# Allegro board IA6140.brd
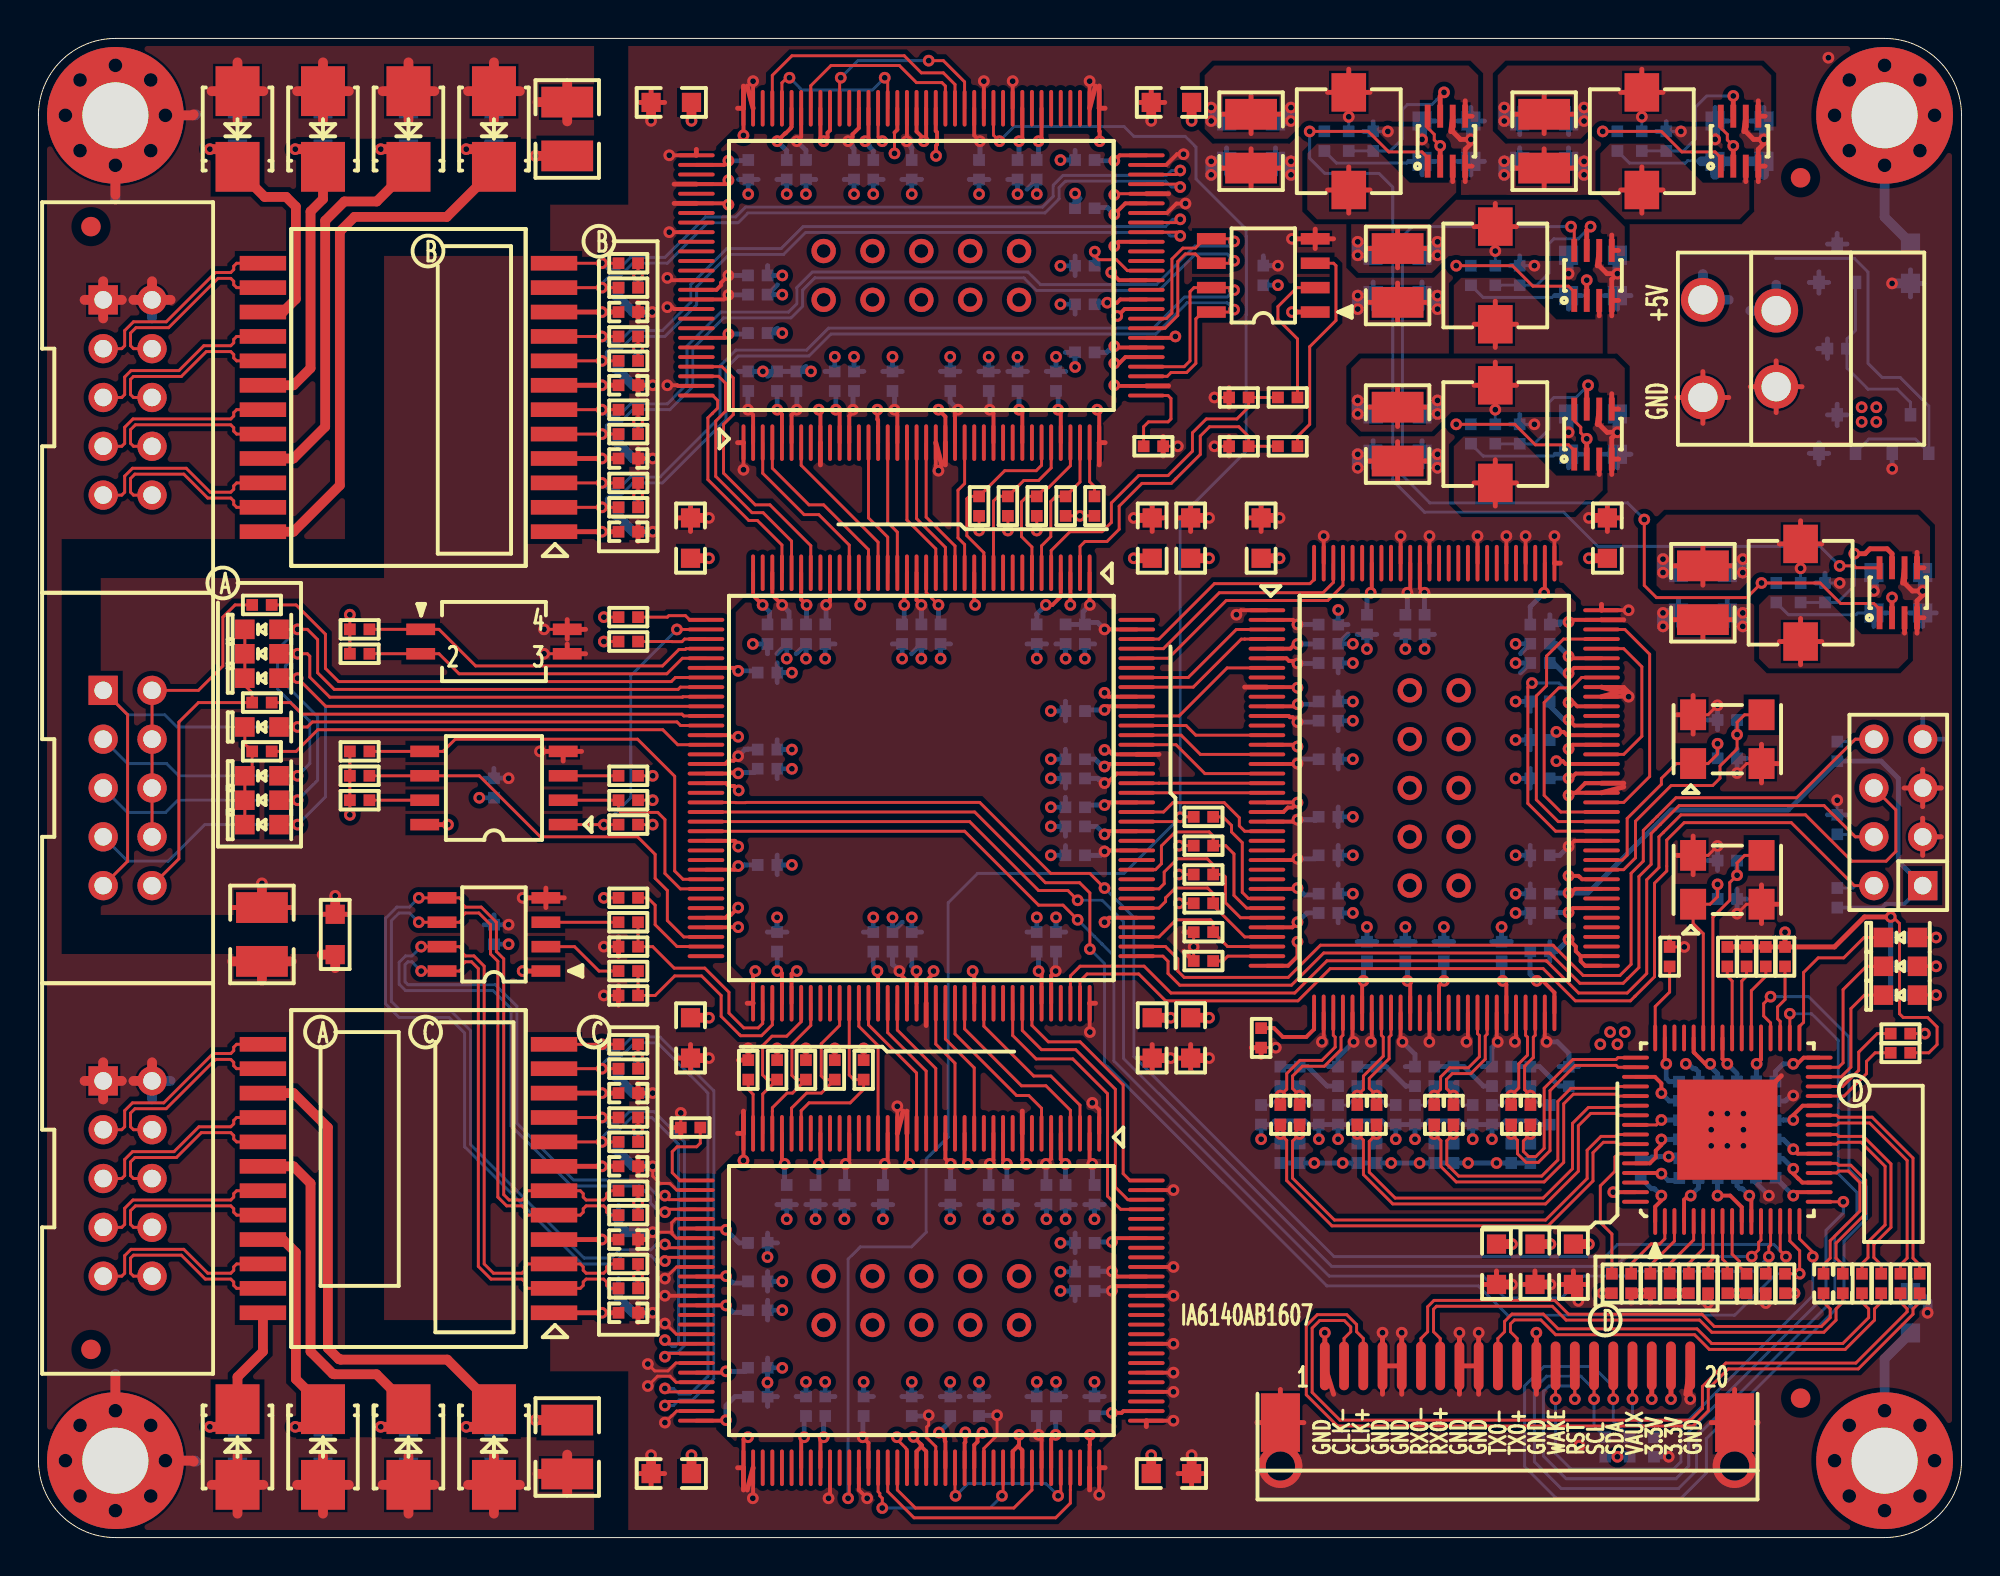
[diagram p0: board, top side]
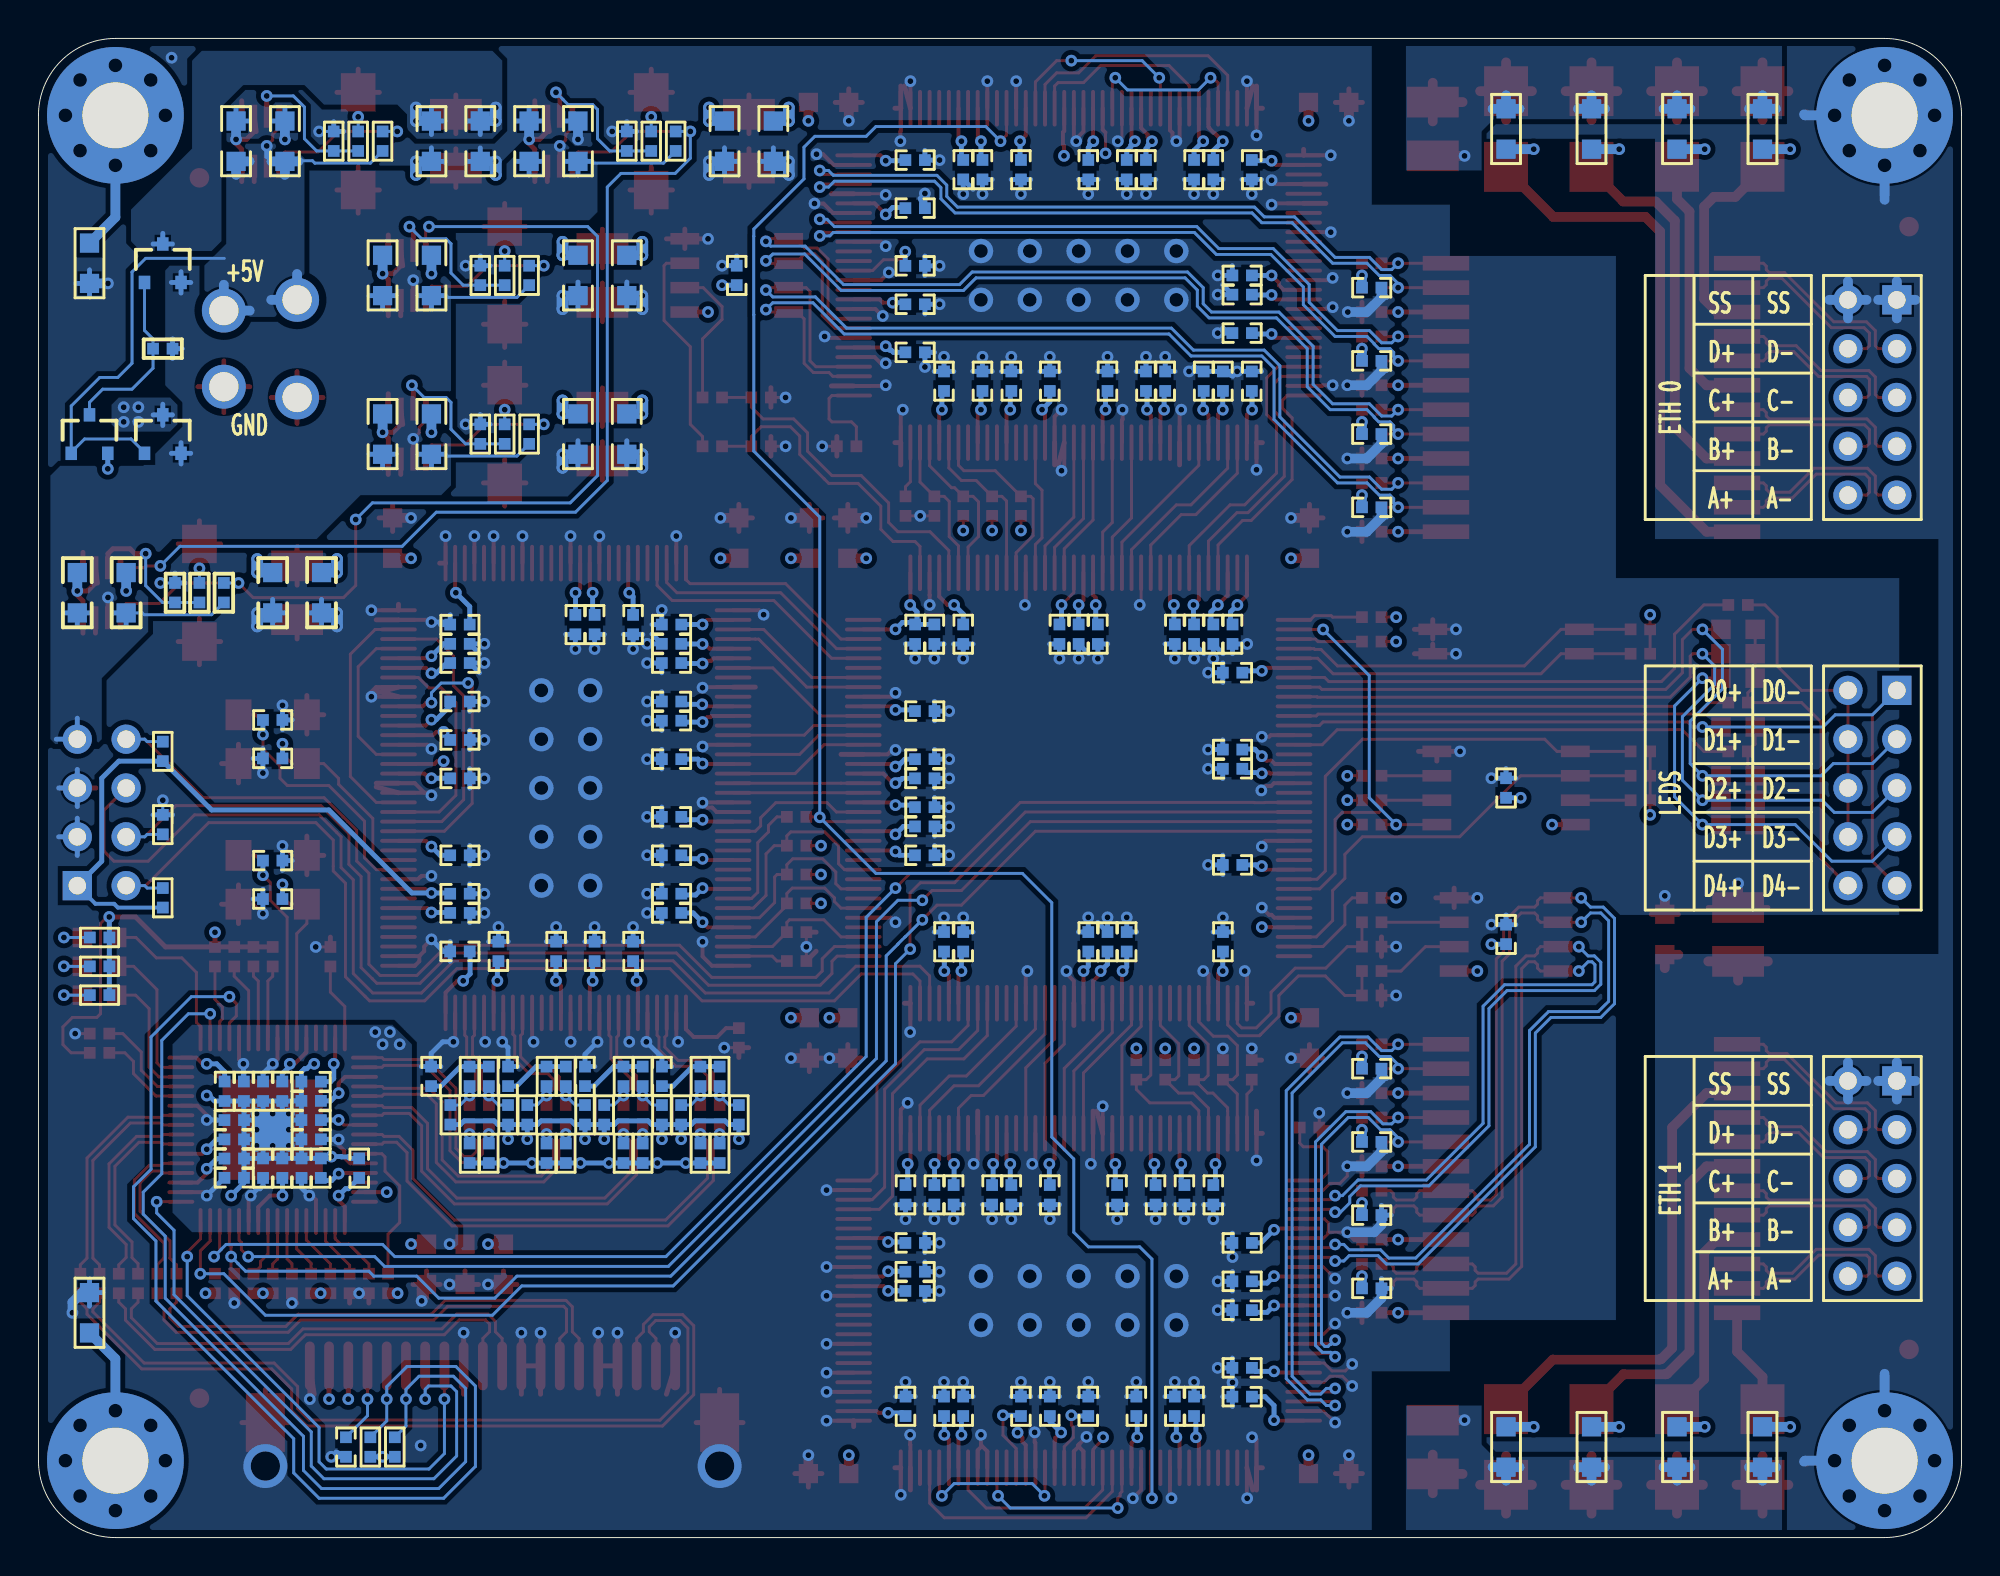
[diagram p1: board, bottom side, seen from below]

Outline 100 x 78 mm; copper layers: TOP, L2_GND, L3_PWR, BOTTOM. Coordinates in mm from the lower left corner of the outline.
Outline path: 0,74 arc(1.17,76.83) 4,78 96,78 arc(98.83,76.83) 100,74 100,4 arc(98.83,1.17) 96,0 4,0 arc(1.17,1.17) 0,4 0,74

## Design rules (mm)
net group MDI00: nets MDI00N MDI00P
net group MDI01: nets MDI01N MDI01P
net group MDI02: nets MDI02N MDI02P
net group MDI03: nets MDI03N MDI03P
net group MDI10: nets MDI10N MDI10P
net group MDI11: nets MDI11N MDI11P
net group MDI12: nets MDI12N MDI12P
net group MDI13: nets MDI13N MDI13P
net group MDI20: nets MDI20N MDI20P
net group MDI21: nets MDI21N MDI21P
net group MDI22: nets MDI22N MDI22P
net group MDI23: nets MDI23N MDI23P
net group PEC: nets PECN PECP
net group PER: nets PERN PERP
net group PER0: nets PER0N PER0P
net group PET: nets PETN PETP
net group PET0: nets PET0N PET0P
net group PHY00: nets PHY00N PHY00P
net group PHY01: nets PHY01N PHY01P
net group PHY02: nets PHY02N PHY02P
net group PHY03: nets PHY03N PHY03P
net group PHY10: nets PHY10N PHY10P
net group PHY11: nets PHY11N PHY11P
net group PHY12: nets PHY12N PHY12P
net group PHY13: nets PHY13N PHY13P
net group PHY20: nets PHY20N PHY20P
net group PHY21: nets PHY21N PHY21P
net group PHY22: nets PHY22N PHY22P
net group PHY23: nets PHY23N PHY23P
net group REFCLK: nets REFCLKN REFCLKP

## Placement (name value [footprint] x y rotation side)
C1  100nF  [CCC0402RZCR]  93.82 13.22 270 top
C2  100nF  [CCC0402RZCR]  92.82 13.22 270 top
C3  100uF  [CCC1210RZAR]  86.55 49.16 270 top
C4  22uF  [CCC0805RZAR]  81.58 52 90 top
C5  22uF  [CCC0805RZAR]  79.82 14.22 270 top
C6  100uF  [CCC1210RZAR]  78.3 72.66 270 top
C7  22uF  [CCC0805RZAR]  77.82 14.22 270 top
C8  100nF  [CCC0402RZCR]  77.58 22 270 top
C9  100nF  [CCC0402RZCR]  76.58 22 270 top
C10  22uF  [CCC0805RZAR]  75.82 14.22 270 top
C11  100nF  [CCC0402RZCR]  73.58 22 270 top
C12  100nF  [CCC0402RZCR]  72.58 22 270 top
C13  100uF  [CCC1210RZAR]  70.68 57.42 270 top
C14  100uF  [CCC1210RZAR]  70.68 65.67 270 top
C15  100nF  [CCC0402RZCR]  69.58 22 270 top
C16  100nF  [CCC0402RZCR]  68.58 22 270 top
C17  100nF  [CCC0402RZCR]  65.58 22 270 top
C18  100nF  [CCC0402RZCR]  64.58 22 270 top
C19  22uF  [CCC0805RZAR]  63.58 52 90 top
C20  100uF  [CCC1210RZAR]  63.06 72.66 270 top
C21  22uF  [CCC0805RZAR]  59.91 26 270 top
C22  22uF  [CCC0805RZAR]  59.91 52 90 top
C23  22uF  [CCC0805RZAR]  58.91 3.33 0 top
C24  22uF  [CCC0805RZAR]  58.91 74.67 180 top
C25  22uF  [CCC0805RZAR]  57.91 26 270 top
C26  22uF  [CCC0805RZAR]  57.91 52 90 top
C27  22uF  [CCC0805RZAR]  33.91 26 270 top
C28  22uF  [CCC0805RZAR]  33.91 52 90 top
C29  22uF  [CCC0805RZAR]  32.91 3.33 180 top
C30  22uF  [CCC0805RZAR]  32.91 74.67 180 top
C31  100nF  [CCC0402RZCR]  30.67 11.7 0 top
C32  100nF  [CCC0402RZCR]  30.67 15.51 0 top
C33  100nF  [CCC0402RZCR]  30.67 19.32 0 top
C34  100nF  [CCC0402RZCR]  30.67 23.13 0 top
C35  100nF  [CCC0402RZCR]  30.67 52.34 0 top
C36  100nF  [CCC0402RZCR]  30.67 56.15 0 top
C37  100nF  [CCC0402RZCR]  30.67 59.96 0 top
C38  100nF  [CCC0402RZCR]  30.67 63.77 0 top
C39  1nF 2kV  [CCC1210RZAR]  27.5 4.71 270 top
C40  1nF 2kV  [CCC1210RZAR]  27.5 73.29 90 top
C41  1nF 2kV  [CCC1210RZAR]  11.62 31.38 90 top
C42  22uF  [CCC0805RZAR]  97.98 49.16 90 bottom
C43  22uF  [CCC0805RZAR]  95.44 49.16 90 bottom
C44  100nF  [CCC0402RZCR]  90.32 23.22 270 bottom
C45  100nF  [CCC0402RZCR]  89.82 18.72 180 bottom
C46  100nF  [CCC0402RZCR]  89.82 19.72 180 bottom
C47  100nF  [CCC0402RZCR]  89.82 20.72 180 bottom
C48  100nF  [CCC0402RZCR]  89.82 21.72 180 bottom
C49  22uF  [CCC0805RZAR]  89.73 72.66 90 bottom
C50  100nF  [CCC0402RZCR]  89.32 23.22 270 bottom
C51  100nF  [CCC0402RZCR]  88.32 19.22 90 bottom
C52  100nF  [CCC0402RZCR]  88.32 23.22 270 bottom
C53  22pF  [CCC0402RZCR]  87.82 33.22 0 bottom
C54  22pF  [CCC0402RZCR]  87.82 35.23 180 bottom
C55  22pF  [CCC0402RZCR]  87.82 40.54 0 bottom
C56  22pF  [CCC0402RZCR]  87.82 42.54 180 bottom
C57  22uF  [CCC0805RZAR]  87.82 49.16 270 bottom
C58  100nF  [CCC0402RZCR]  87.32 19.22 90 bottom
C59  100nF  [CCC0402RZCR]  87.32 23.22 270 bottom
C60  22uF  [CCC0805RZAR]  87.19 72.66 90 bottom
C61  100nF  [CCC0402RZCR]  86.32 19.22 90 bottom
C62  100nF  [CCC0402RZCR]  85.82 20.72 0 bottom
C63  100nF  [CCC0402RZCR]  85.82 21.72 0 bottom
C64  100nF  [CCC0402RZCR]  85.82 22.72 0 bottom
C65  100nF  [CCC0402RZCR]  85.82 23.72 0 bottom
C66  100nF  [CCC0402RZCR]  85.32 19.22 90 bottom
C67  22uF  [CCC0805RZAR]  85.28 49.16 270 bottom
C68  100nF  [CCC0402RZCR]  84.01 4.71 270 bottom
C69  100nF  [CCC0402RZCR]  83.32 19.22 90 bottom
C70  22uF  [CCC0805RZAR]  82.11 57.42 90 bottom
C71  22uF  [CCC0805RZAR]  82.11 65.67 90 bottom
C72  100nF  [CCC0402RZCR]  79.58 24 90 bottom
C73  22uF  [CCC0805RZAR]  79.57 57.42 90 bottom
C74  22uF  [CCC0805RZAR]  79.57 65.67 90 bottom
C75  22uF  [CCC0805RZAR]  79.57 72.66 270 bottom
C76  100nF  [CCC0402RZCR]  78.08 30.5 0 bottom
C77  100nF  [CCC0402RZCR]  78.08 32.5 180 bottom
C78  100nF  [CCC0402RZCR]  78.08 33.5 180 bottom
C79  100nF  [CCC0402RZCR]  78.08 35.5 180 bottom
C80  100nF  [CCC0402RZCR]  78.08 39.5 180 bottom
C81  100nF  [CCC0402RZCR]  78.08 41.5 180 bottom
C82  100nF  [CCC0402RZCR]  78.08 43.5 180 bottom
C83  100nF  [CCC0402RZCR]  78.08 45.5 180 bottom
C84  100nF  [CCC0402RZCR]  78.08 46.5 180 bottom
C85  100nF  [CCC0402RZCR]  78.08 47.5 0 bottom
C86  22uF  [CCC0805RZAR]  77.03 72.66 270 bottom
C87  100nF  [CCC0402RZCR]  76.08 30.5 90 bottom
C88  100nF  [CCC0402RZCR]  75.58 24 90 bottom
C89  22uF  [CCC0805RZAR]  74.49 72.66 90 bottom
C90  100nF  [CCC0402RZCR]  73.08 30.5 90 bottom
C91  100nF  [CCC0402RZCR]  72.08 47.5 270 bottom
C92  22uF  [CCC0805RZAR]  71.95 57.42 270 bottom
C93  22uF  [CCC0805RZAR]  71.95 65.67 270 bottom
C94  22uF  [CCC0805RZAR]  71.95 72.66 90 bottom
C95  100nF  [CCC0402RZCR]  71.58 24 90 bottom
C96  100nF  [CCC0402RZCR]  71.08 30.5 90 bottom
C97  100nF  [CCC0402RZCR]  71.08 47.5 270 bottom
C98  22uF  [CCC0805RZAR]  69.41 57.42 270 bottom
C99  22uF  [CCC0805RZAR]  69.41 65.67 270 bottom
C100  100nF  [CCC0402RZCR]  69.08 30.5 90 bottom
C101  100nF  [CCC0402RZCR]  69.08 47.5 270 bottom
C102  100nF  [CCC0402RZCR]  67.58 24 90 bottom
C103  100nF  [CCC0402RZCR]  67.08 32.5 0 bottom
C104  100nF  [CCC0402RZCR]  67.08 33.5 0 bottom
C105  100nF  [CCC0402RZCR]  67.08 35.5 0 bottom
C106  100nF  [CCC0402RZCR]  67.08 37.5 0 bottom
C107  100nF  [CCC0402RZCR]  67.08 40.5 0 bottom
C108  100nF  [CCC0402RZCR]  67.08 42.5 0 bottom
C109  100nF  [CCC0402RZCR]  67.08 43.5 0 bottom
C110  100nF  [CCC0402RZCR]  67.08 45.5 0 bottom
C111  100nF  [CCC0402RZCR]  67.08 46.5 0 bottom
C112  100nF  [CCC0402RZCR]  67.08 47.5 0 bottom
C113  22uF  [CCC0805RZAR]  64.33 72.66 270 bottom
C114  100nF  [CCC0402RZCR]  63.69 65.67 90 bottom
C115  22uF  [CCC0805RZAR]  61.79 72.66 270 bottom
C116  100nF  [CCC0402RZCR]  54.91 6.83 90 bottom
C117  100nF  [CCC0402RZCR]  54.91 17.83 270 bottom
C118  100nF  [CCC0402RZCR]  54.41 12.83 180 bottom
C119  100nF  [CCC0402RZCR]  54.41 13.83 180 bottom
C120  100nF  [CCC0402RZCR]  54.41 15.33 180 bottom
C121  100nF  [CCC0402RZCR]  54.41 47 270 bottom
C122  100nF  [CCC0402RZCR]  54.41 61.67 180 bottom
C123  100nF  [CCC0402RZCR]  54.41 64.17 180 bottom
C124  100nF  [CCC0402RZCR]  54.41 66.17 180 bottom
C125  100nF  [CCC0402RZCR]  54.41 69.17 180 bottom
C126  100nF  [CCC0402RZCR]  54.41 71.67 180 bottom
C127  100nF  [CCC0402RZCR]  53.91 35.5 180 bottom
C128  100nF  [CCC0402RZCR]  53.91 37 180 bottom
C129  100nF  [CCC0402RZCR]  53.91 38 180 bottom
C130  100nF  [CCC0402RZCR]  53.91 39.5 180 bottom
C131  100nF  [CCC0402RZCR]  53.91 40.5 180 bottom
C132  100nF  [CCC0402RZCR]  53.91 43 180 bottom
C133  100nF  [CCC0402RZCR]  53.41 17.83 270 bottom
C134  100nF  [CCC0402RZCR]  53.41 47 270 bottom
C135  100nF  [CCC0402RZCR]  52.91 6.83 90 bottom
C136  100nF  [CCC0402RZCR]  52.91 31 90 bottom
C137  100nF  [CCC0402RZCR]  52.91 60.17 90 bottom
C138  100nF  [CCC0402RZCR]  52.41 17.83 270 bottom
C139  100nF  [CCC0402RZCR]  51.91 6.83 90 bottom
C140  100nF  [CCC0402RZCR]  51.91 31 90 bottom
C141  100nF  [CCC0402RZCR]  51.91 47 270 bottom
C142  100nF  [CCC0402RZCR]  51.91 71.17 270 bottom
C143  100nF  [CCC0402RZCR]  50.91 60.17 90 bottom
C144  100nF  [CCC0402RZCR]  50.91 71.17 270 bottom
C145  100nF  [CCC0402RZCR]  50.41 17.83 270 bottom
C146  100nF  [CCC0402RZCR]  49.41 17.83 270 bottom
C147  100nF  [CCC0402RZCR]  49.41 60.17 90 bottom
C148  100nF  [CCC0402RZCR]  48.91 6.83 90 bottom
C149  100nF  [CCC0402RZCR]  48.91 71.17 270 bottom
C150  100nF  [CCC0402RZCR]  47.41 6.83 90 bottom
C151  100nF  [CCC0402RZCR]  47.41 17.83 270 bottom
C152  100nF  [CCC0402RZCR]  47.41 60.17 90 bottom
C153  100nF  [CCC0402RZCR]  46.91 47 270 bottom
C154  100nF  [CCC0402RZCR]  45.91 47 270 bottom
C155  100nF  [CCC0402RZCR]  45.41 6.83 90 bottom
C156  100nF  [CCC0402RZCR]  45.41 31 90 bottom
C157  100nF  [CCC0402RZCR]  45.41 71.17 270 bottom
C158  100nF  [CCC0402RZCR]  44.91 47 270 bottom
C159  100nF  [CCC0402RZCR]  44.41 31 90 bottom
C160  100nF  [CCC0402RZCR]  44.41 60.17 90 bottom
C161  100nF  [CCC0402RZCR]  43.91 17.83 270 bottom
C162  100nF  [CCC0402RZCR]  43.41 31 90 bottom
C163  100nF  [CCC0402RZCR]  43.41 71.17 270 bottom
C164  100nF  [CCC0402RZCR]  42.91 6.83 90 bottom
C165  100nF  [CCC0402RZCR]  42.41 60.17 90 bottom
C166  100nF  [CCC0402RZCR]  42.41 71.17 270 bottom
C167  100nF  [CCC0402RZCR]  41.91 17.83 270 bottom
C168  100nF  [CCC0402RZCR]  41.41 60.17 90 bottom
C169  100nF  [CCC0402RZCR]  40.91 6.83 90 bottom
C170  100nF  [CCC0402RZCR]  40.91 47 270 bottom
C171  100nF  [CCC0402RZCR]  40.41 17.83 270 bottom
C172  100nF  [CCC0402RZCR]  39.91 6.83 90 bottom
C173  100nF  [CCC0402RZCR]  39.91 47 270 bottom
C174  100nF  [CCC0402RZCR]  39.91 71.17 270 bottom
C175  100nF  [CCC0402RZCR]  39.41 60.17 90 bottom
C176  100nF  [CCC0402RZCR]  38.91 17.83 270 bottom
C177  100nF  [CCC0402RZCR]  38.91 47 270 bottom
C178  100nF  [CCC0402RZCR]  38.91 71.17 270 bottom
C179  100nF  [CCC0402RZCR]  38.41 31 90 bottom
C180  100nF  [CCC0402RZCR]  38.41 60.17 90 bottom
C181  100nF  [CCC0402RZCR]  37.91 35 0 bottom
C182  100nF  [CCC0402RZCR]  37.91 40 0 bottom
C183  100nF  [CCC0402RZCR]  37.91 41 0 bottom
C184  100nF  [CCC0402RZCR]  37.91 45 0 bottom
C185  100nF  [CCC0402RZCR]  37.91 47 270 bottom
C186  100nF  [CCC0402RZCR]  37.41 7.33 0 bottom
C187  100nF  [CCC0402RZCR]  37.41 8.83 0 bottom
C188  100nF  [CCC0402RZCR]  37.41 11.83 0 bottom
C189  100nF  [CCC0402RZCR]  37.41 13.33 0 bottom
C190  100nF  [CCC0402RZCR]  37.41 15.33 0 bottom
C191  100nF  [CCC0402RZCR]  37.41 62.67 0 bottom
C192  100nF  [CCC0402RZCR]  37.41 64.67 0 bottom
C193  100nF  [CCC0402RZCR]  37.41 65.67 0 bottom
C194  100nF  [CCC0402RZCR]  36.91 60.17 90 bottom
C195  100nF  [CCC0402RZCR]  36.91 71.17 270 bottom
C196  100nF  [CCC0402RZCR]  30.67 12.97 180 bottom
C197  100nF  [CCC0402RZCR]  30.67 16.78 180 bottom
C198  100nF  [CCC0402RZCR]  30.67 20.59 180 bottom
C199  100nF  [CCC0402RZCR]  30.67 24.4 180 bottom
C200  100nF  [CCC0402RZCR]  30.67 53.61 180 bottom
C201  100nF  [CCC0402RZCR]  30.67 57.42 180 bottom
C202  100nF  [CCC0402RZCR]  30.67 61.23 180 bottom
C203  100nF  [CCC0402RZCR]  30.67 65.04 180 bottom
C204  100nF  [CCC0402RZCR]  23.69 31.38 90 bottom
C205  100nF  [CCC0402RZCR]  23.69 39 90 bottom
D1  Yellow  [LED0603RZBR]  96.82 28.22 180 top
D2  Orange  [LED0603RZBR]  96.82 29.72 180 top
D3  Green  [LED0603RZBR]  96.82 31.22 180 top
D4  SMBJ90CA  [SMB]  23.69 4.71 90 top
D5  SMBJ90CA  [SMB]  23.69 73.29 270 top
D6  SMBJ90CA  [SMB]  19.24 4.71 90 top
D7  SMBJ90CA  [SMB]  19.24 73.29 270 top
D8  SMBJ90CA  [SMB]  14.8 4.71 90 top
D9  SMBJ90CA  [SMB]  14.8 73.29 270 top
D10  Green  [LED0603RZBR]  11.62 37.1 180 top
D11  Yellow  [LED0603RZBR]  11.62 38.37 180 top
D12  Orange  [LED0603RZBR]  11.62 39.64 180 top
D13  Red  [LED0603RZBR]  11.62 42.18 180 top
D14  Green  [LED0603RZBR]  11.62 44.72 180 top
D15  Yellow  [LED0603RZBR]  11.62 45.99 180 top
D16  Orange  [LED0603RZBR]  11.62 47.26 180 top
D17  SMBJ90CA  [SMB]  10.35 4.71 90 top
D18  SMBJ90CA  [SMB]  10.35 73.29 270 top
FM1  Fiducial  [FIDUCIAL]  91.63 7.25 0 top
FM2  Fiducial  [FIDUCIAL]  91.63 70.75 0 top
FM3  Fiducial  [FIDUCIAL]  2.73 9.79 0 top
FM4  Fiducial  [FIDUCIAL]  2.73 68.21 0 top
J1  FEMALE HDR 4X2  [HDR-4X2]  96.71 37.73 90 top
J2  TERM2 3.96mm  [TERM2-3R96MM]  90.36 61.86 270 top
J3  TERM2 5.08mm  [TERM2-5R08MM]  86.55 61.86 270 top
J4  FPC 1.0mm 20P  [FPC-1R0-20]  76.39 5.98 0 top
J5  CONN SOCKET 2x5  [IDC-2X5]  4.64 18.68 270 top
J6  CONN SOCKET 2x5  [IDC-2X5]  4.64 39 270 top
J7  CONN SOCKET 2x5  [IDC-2X5]  4.64 59.32 270 top
L1  IHLP2020-222  [LTC5550RZBR]  91.63 49.16 270 top
L2  IHLP2020-222  [LTC5550RZBR]  83.38 72.66 270 top
L3  IHLP2020-222  [LTC5550RZBR]  75.76 57.42 270 top
L4  IHLP2020-222  [LTC5550RZBR]  75.76 65.67 270 top
L5  IHLP2020-222  [LTC5550RZBR]  68.14 72.66 270 top
M1  MH 4mm  [MTH-135]  96 4 0 top
M2  MH 4mm  [MTH-135]  96 74 0 top
M3  MH 4mm  [MTH-135]  4 4 0 top
M4  MH 4mm  [MTH-135]  4 74 0 top
NOREF  -  []  36 32.27 0 top
NOREF#2  -  []  4 74 0 top
NOREF#3  -  []  -55.69 -143.88 0 top
NOREF#4  -  []  0 74 0 top
NOREF#5  -  []  4 4 90 top
NOREF#6  -  []  4 0 90 top
Q1  2N7002  [SOT23RZAR-MOSFET]  97.35 57.42 180 bottom
Q2  SI2303DS  [SOT23RZAR-MOSFET]  93.54 57.42 180 bottom
Q3  SI2303DS  [SOT23RZAR-MOSFET]  93.54 66.31 180 bottom
R1  0  [RRC0402RZCR]  97.82 13.22 270 top
R2  0  [RRC0402RZCR]  96.82 13.22 270 top
R3  1k  [RRC0402RZCR]  96.82 25.22 180 top
R4  1k  [RRC0402RZCR]  96.82 26.22 0 top
R5  0  [RRC0402RZCR]  95.82 13.22 270 top
R6  0  [RRC0402RZCR]  94.82 13.22 270 top
R7  10k  [RRC0402RZCR]  90.82 13.22 90 top
R8  10k  [RRC0402RZCR]  90.82 30.22 270 top
R9  10k  [RRC0402RZCR]  89.82 13.22 270 top
R10  1k  [RRC0402RZCR]  89.82 30.22 270 top
R11  10k  [RRC0402RZCR]  88.82 13.22 90 top
R12  1k  [RRC0402RZCR]  88.82 30.22 270 top
R13  10k  [RRC0402RZCR]  87.82 13.22 90 top
R14  1k  [RRC0402RZCR]  87.82 30.22 270 top
R15  10k  [RRC0402RZCR]  86.82 13.22 270 top
R16  1k  [RRC0402RZCR]  85.82 13.22 90 top
R17  1k  [RRC0402RZCR]  84.82 13.22 90 top
R18  4.99k  [RRC0402RZCR]  84.82 30.22 90 top
R19  10k  [RRC0402RZCR]  83.82 13.22 270 top
R20  10k  [RRC0402RZCR]  82.82 13.22 270 top
R21  1k  [RRC0402RZCR]  81.82 13.22 90 top
R22  330  [RRC0402RZCR]  64.96 56.78 180 top
R23  330  [RRC0402RZCR]  64.96 59.32 180 top
R24  4.99k  [RRC0402RZCR]  63.58 26 270 top
R25  1k  [RRC0402RZCR]  62.42 56.78 180 top
R26  1k  [RRC0402RZCR]  62.42 59.32 180 top
R27  1k  [RRC0402RZCR]  60.58 30 180 top
R28  1k  [RRC0402RZCR]  60.58 31.5 180 top
R29  1k  [RRC0402RZCR]  60.58 33 0 top
R30  1k  [RRC0402RZCR]  60.58 34.5 0 top
R31  1k  [RRC0402RZCR]  60.58 36 0 top
R32  0  [RRC0402RZCR]  60.58 37.5 0 top
R33  4.99k  [RRC0402RZCR]  57.98 56.78 0 top
R34  1k  [RRC0402RZCR]  54.91 53.67 270 top
R35  1k  [RRC0402RZCR]  53.41 53.67 270 top
R36  1k  [RRC0402RZCR]  51.91 53.67 90 top
R37  1k  [RRC0402RZCR]  50.41 53.67 90 top
R38  1k  [RRC0402RZCR]  48.91 53.67 90 top
R39  1k  [RRC0402RZCR]  42.91 24.33 270 top
R40  1k  [RRC0402RZCR]  41.41 24.33 270 top
R41  1k  [RRC0402RZCR]  39.91 24.33 270 top
R42  1k  [RRC0402RZCR]  38.41 24.33 90 top
R43  1k  [RRC0402RZCR]  36.91 24.33 90 top
R44  4.99k  [RRC0402RZCR]  33.91 21.33 180 top
R45  49.9  [RRC0402RZCR]  30.67 12.97 0 top
R46  49.9  [RRC0402RZCR]  30.67 14.24 0 top
R47  49.9  [RRC0402RZCR]  30.67 16.78 0 top
R48  49.9  [RRC0402RZCR]  30.67 18.05 0 top
R49  49.9  [RRC0402RZCR]  30.67 20.59 0 top
R50  49.9  [RRC0402RZCR]  30.67 21.86 0 top
R51  49.9  [RRC0402RZCR]  30.67 24.4 0 top
R52  49.9  [RRC0402RZCR]  30.67 25.67 0 top
R53  1k  [RRC0402RZCR]  30.67 28.21 180 top
R54  330  [RRC0402RZCR]  30.67 29.48 0 top
R55  1k  [RRC0402RZCR]  30.67 30.75 180 top
R56  330  [RRC0402RZCR]  30.67 32.02 0 top
R57  330  [RRC0402RZCR]  30.67 33.29 0 top
R58  10k  [RRC0402RZCR]  30.67 37.1 180 top
R59  10k  [RRC0402RZCR]  30.67 38.37 180 top
R60  10k  [RRC0402RZCR]  30.67 39.64 180 top
R61  1k  [RRC0402RZCR]  30.67 46.62 180 top
R62  1k  [RRC0402RZCR]  30.67 47.89 0 top
R63  49.9  [RRC0402RZCR]  30.67 53.61 0 top
R64  49.9  [RRC0402RZCR]  30.67 54.88 0 top
R65  49.9  [RRC0402RZCR]  30.67 57.42 0 top
R66  49.9  [RRC0402RZCR]  30.67 58.69 0 top
R67  49.9  [RRC0402RZCR]  30.67 61.23 0 top
R68  49.9  [RRC0402RZCR]  30.67 62.5 0 top
R69  49.9  [RRC0402RZCR]  30.67 65.04 0 top
R70  49.9  [RRC0402RZCR]  30.67 66.31 0 top
R71  10k  [RRC0402RZCR]  16.7 38.37 0 top
R72  10k  [RRC0402RZCR]  16.7 39.64 0 top
R73  10k  [RRC0402RZCR]  16.7 40.91 0 top
R74  10k  [RRC0402RZCR]  16.7 45.99 0 top
R75  10k  [RRC0402RZCR]  16.7 47.26 0 top
R76  0  [RRC0805RZAR]  15.43 31.38 270 top
R77  330  [RRC0402RZCR]  11.62 40.91 180 top
R78  330  [RRC0402RZCR]  11.62 43.45 180 top
R79  330  [RRC0402RZCR]  11.62 48.53 180 top
R80  0  [RRC0805RZAR]  97.35 11.7 90 bottom
R81  0  [RRC0805RZAR]  97.35 66.31 270 bottom
R82  330  [RRC0402RZCR]  96.82 28.22 0 bottom
R83  330  [RRC0402RZCR]  96.82 29.72 0 bottom
R84  330  [RRC0402RZCR]  96.82 31.22 0 bottom
R85  10k  [RRC0402RZCR]  93.54 33.29 90 bottom
R86  10k  [RRC0402RZCR]  93.54 37.1 90 bottom
R87  10k  [RRC0402RZCR]  93.54 40.91 90 bottom
R88  200k  [RRC0402RZCR]  93.54 61.86 0 bottom
R89  93.1k  [RRC0402RZCR]  92.9 49.16 270 bottom
R90  200k  [RRC0402RZCR]  91.63 49.16 90 bottom
R91  1k  [RRC0402RZCR]  90.36 49.16 90 bottom
R92  44.2k  [RRC0402RZCR]  84.65 72.66 270 bottom
R93  200k  [RRC0402RZCR]  83.38 72.66 90 bottom
R94  10k  [RRC0402RZCR]  82.74 4.71 90 bottom
R95  1k  [RRC0402RZCR]  82.11 72.66 90 bottom
R96  10k  [RRC0402RZCR]  81.47 4.71 90 bottom
R97  49.9  [RRC0402RZCR]  78.58 22 90 bottom
R98  49.9  [RRC0402RZCR]  77.58 20 90 bottom
R99  49.9  [RRC0402RZCR]  77.58 24 90 bottom
R100  200k  [RRC0402RZCR]  77.03 57.42 270 bottom
R101  267k  [RRC0402RZCR]  77.03 65.67 270 bottom
R102  49.9  [RRC0402RZCR]  76.58 20 90 bottom
R103  49.9  [RRC0402RZCR]  76.58 24 90 bottom
R104  200k  [RRC0402RZCR]  75.76 57.42 90 bottom
R105  200k  [RRC0402RZCR]  75.76 65.67 90 bottom
R106  49.9  [RRC0402RZCR]  75.58 22 90 bottom
R107  49.9  [RRC0402RZCR]  74.58 22 90 bottom
R108  1k  [RRC0402RZCR]  74.49 57.42 90 bottom
R109  1k  [RRC0402RZCR]  74.49 65.67 90 bottom
R110  49.9  [RRC0402RZCR]  73.58 20 90 bottom
R111  49.9  [RRC0402RZCR]  73.58 24 90 bottom
R112  49.9  [RRC0402RZCR]  72.58 20 90 bottom
R113  49.9  [RRC0402RZCR]  72.58 24 90 bottom
R114  49.9  [RRC0402RZCR]  71.58 22 90 bottom
R115  49.9  [RRC0402RZCR]  70.58 22 90 bottom
R116  49.9  [RRC0402RZCR]  69.58 20 90 bottom
R117  49.9  [RRC0402RZCR]  69.58 24 90 bottom
R118  63.4k  [RRC0402RZCR]  69.41 72.66 270 bottom
R119  49.9  [RRC0402RZCR]  68.58 20 90 bottom
R120  49.9  [RRC0402RZCR]  68.58 24 90 bottom
R121  200k  [RRC0402RZCR]  68.14 72.66 90 bottom
R122  49.9  [RRC0402RZCR]  67.58 22 90 bottom
R123  1k  [RRC0402RZCR]  66.87 72.66 90 bottom
R124  49.9  [RRC0402RZCR]  66.58 22 90 bottom
R125  49.9  [RRC0402RZCR]  65.58 20 90 bottom
R126  49.9  [RRC0402RZCR]  65.58 24 90 bottom
R127  49.9  [RRC0402RZCR]  64.58 20 90 bottom
R128  49.9  [RRC0402RZCR]  64.58 24 90 bottom
R129  49.9  [RRC0402RZCR]  63.58 22 90 bottom
R130  75  [RRC0805RZAR]  23.69 4.71 270 bottom
R131  75  [RRC0805RZAR]  23.69 73.29 90 bottom
R132  75  [RRC0805RZAR]  19.24 4.71 270 bottom
R133  75  [RRC0805RZAR]  19.24 73.29 90 bottom
R134  75  [RRC0805RZAR]  14.8 4.71 270 bottom
R135  75  [RRC0805RZAR]  14.8 73.29 90 bottom
R136  75  [RRC0805RZAR]  10.35 4.71 270 bottom
R137  75  [RRC0805RZAR]  10.35 73.29 90 bottom
U1  MP2143DJ  [TSOT23-8]  96.71 49.16 90 top
U2  MP2143DJ  [TSOT23-8]  88.46 72.66 90 top
U3  WG82574IT  [QFN064RCCS]  87.82 21.22 0 top
U4  MP2143DJ  [TSOT23-8]  80.84 57.42 90 top
U5  MP2143DJ  [TSOT23-8]  80.84 65.67 90 top
U6  MP2143DJ  [TSOT23-8]  73.22 72.66 90 top
U7  88E1111-XX-RCJ1I  [PQFP128_38X26]  72.58 39 0 top
U8  SN65LVDS34D  [SOC008RHAS]  63.69 65.67 90 top
U9  88E1111-XX-RCJ1I  [PQFP128_38X26]  45.91 65.67 90 top
U10  88E1111-XX-RCJ1I  [PQFP128_38X26]  45.91 12.33 270 top
U11  XC6SLX9-2TQG144I  [TQFP144]  45.91 39 270 top
U12  SN65LVDS34D  [SOC008RHAS]  23.69 31.38 90 top
U13  N25Q064A13ESE40F  [SOC008RHDR]  23.69 39 90 top
U14  CHS-02A1  [SWC004RZBS]  23.69 46.62 270 top
U15  -  [H5007NL]  19.24 18.68 180 top
U16  -  [H5007NL]  19.24 59.32 180 top
Y1  NX3225GA-25.000M-STD-CSY-1  [XTC004RZBR]  87.82 34.22 0 top
Y2  NX3225GA-25.000M-STD-CSY-1  [XTC004RZBR]  87.82 41.54 0 top

## Library data of the parts
C1-C3 C6 C8 C9 C11-C18 C20 C31-C41 C44-C48 C50-C56 C58 C59 C61-C66 C68 C69 C72 C76-C85 C87 C88 C90 C91 C95-C97 C100-C112 C114 C116-C205 = CAPACITOR
C4 C5 C7 C10 C19 C21-C30 = CAPACITOR: Tolerance: ?
C42 C43 C49 C57 C60 C67 C70 C71 C73-C75 C86 C89 C92-C94 C98 C99 C113 C115 = CAPACITOR_0: Tolerance: ?
D1-D3 D10-D16 = 1N6265/TO_0
D4-D9 D17 D18 = DIODE TVS BI-DIR
FM1-FM4 = 00_Fiducial_0
J1 = HEADER 4X2
J2 J3 = CON2
J4 = FPC CONN 20
J5-J7 = CONN SOCKET 5x2
L1-L5 = INDUCTOR
M1-M4 = MOUNTING HOLE
Q1 = MOSFET N_1
Q2 Q3 = MOSFET P_0
R1-R75 R77-R79 R82-R87 R94 R96-R99 R102 R103 R106 R107 R110-R117 R119 R120 R122 R124-R129 = RESISTOR
R76 R80 R81 = RESISTOR_0: Tolerance: ?
R88-R93 R95 R100 R101 R104 R105 R108 R109 R118 R121 R123 = RESISTOR_0
R130-R137 = RESISTOR: Tolerance: ?
U1 U2 U4-U6 = MP2143
U3 = WG82574: User Part Number: QFN064RCBS; Tolerance: ?
U7 U9 U10 = 88E1111-RCJ
U8 U12 = SN65LVDS34D: User Part Number: SOC008RHAS; Tolerance: ?
U11 = XC6SLX9-TQG144
U13 = M25P32_0
U14 = CHS-02A1
U15 U16 = H5007NL
Y1 Y2 = CRYSTAL/13

## Footprints (pads in the part's own frame, mm; a bottom-side part is the same pattern mirrored in y, then rotated)
CCC0402RZCR
  rect 0.61x0.61 smd: 1(-0.508,0) 2(0.508,0)
CCC0805RZAR
  rect 1x1 smd: 1(-1.05,0) 2(1.05,0)
CCC1210RZAR
  rect 1.6x2.692 smd: 1(-1.4,0) 2(1.4,0)
FIDUCIAL
  round 1.016 smd: 1(0,0)
FPC-1R0-20
  oval 0.508x2.54 smd: 1(-9.5,2.95) 2(-8.5,2.95) 3(-7.5,2.95) 4(-6.5,2.95) 5(-5.5,2.95) 6(-4.5,2.95) 7(-3.5,2.95) 8(-2.5,2.95) 9(-1.5,2.95) 10(-0.5,2.95) 11(0.5,2.95) 12(1.5,2.95) 13(2.5,2.95) 14(3.5,2.95) 15(4.5,2.95) 16(5.5,2.95) 17(6.5,2.95) 18(7.5,2.95) 19(8.5,2.95) 20(9.5,2.95)
  rect 2.032x3.048 smd: 21(-11.81,0) 22(11.81,0)
H5007NL
  rect 2.413x0.762 smd: 1(-7.569,6.985) 2(-7.569,5.715) 3(-7.569,4.445) 4(-7.569,3.175) 5(-7.569,1.905) 6(-7.569,0.635) 7(-7.569,-0.635) 8(-7.569,-1.905) 9(-7.569,-3.175) 10(-7.569,-4.445) 11(-7.569,-5.715) 12(-7.569,-6.985) 13(7.569,-6.985) 14(7.569,-5.715) 15(7.569,-4.445) 16(7.569,-3.175) 17(7.569,-1.905) 18(7.569,-0.635) 19(7.569,0.635) 20(7.569,1.905) 21(7.569,3.175) 22(7.569,4.445) 23(7.569,5.715) 24(7.569,6.985)
HDR-4X2
  rect 1.524x1.524 hole 0.914: 1(-3.81,-1.27)
  round 1.524 hole 0.914: 2(-3.81,1.27) 3(-1.27,-1.27) 4(-1.27,1.27) 5(1.27,-1.27) 6(1.27,1.27) 7(3.81,-1.27) 8(3.81,1.27)
IDC-2X5
  rect 1.524x1.524 hole 0.914: 1(-5.08,-1.27)
  round 1.524 hole 0.914: 2(-5.08,1.27) 3(-2.54,-1.27) 4(-2.54,1.27) 5(0,-1.27) 6(0,1.27) 7(2.54,-1.27) 8(2.54,1.27) 9(5.08,-1.27) 10(5.08,1.27)
LED0603RZBR
  rect 1.016x1.016 smd: A(-0.889,0) K(0.889,0)
LTC5550RZBR
  rect 2x1.8 smd: 1(2.54,0) 2(-2.54,0)
MTH-135
  round 7.112 hole 3.429: 1(0,0)
PQFP128_38X26
  oval 1.905x0.203 smd: 1(-8.701,9.249) 2(-8.701,8.749) 3(-8.701,8.249) 4(-8.701,7.749) 5(-8.701,7.249) 6(-8.701,6.749) 7(-8.701,6.249) 8(-8.701,5.749) 9(-8.701,5.249) 10(-8.701,4.749) 11(-8.701,4.249) 12(-8.701,3.749) 13(-8.701,3.249) 14(-8.701,2.749) 15(-8.701,2.249) 16(-8.701,1.749) 17(-8.701,1.249) 18(-8.701,0.749) 19(-8.701,0.249) 20(-8.7,-0.25) 21(-8.7,-0.75) 22(-8.7,-1.25) 23(-8.7,-1.75) 24(-8.7,-2.25) 25(-8.7,-2.75) 26(-8.7,-3.25) 27(-8.7,-3.75) 28(-8.7,-4.25) 29(-8.7,-4.75) 30(-8.7,-5.25) 31(-8.7,-5.75) 32(-8.7,-6.25) 33(-8.7,-6.75) 34(-8.7,-7.25) 35(-8.7,-7.75) 36(-8.7,-8.25) 37(-8.7,-8.75) 38(-8.7,-9.25) 65(8.699,-9.249) 66(8.699,-8.749) 67(8.699,-8.249) 68(8.699,-7.749) 69(8.699,-7.249) 70(8.699,-6.749) 71(8.699,-6.249) 72(8.699,-5.749) 73(8.699,-5.249) 74(8.699,-4.749) 75(8.699,-4.249) 76(8.699,-3.749) 77(8.699,-3.249) 78(8.699,-2.749) 79(8.699,-2.249) 80(8.699,-1.749) 81(8.699,-1.249) 82(8.699,-0.749) 83(8.699,-0.249) 84(8.698,0.25) 85(8.698,0.75) 86(8.698,1.25) 87(8.698,1.75) 88(8.698,2.25) 89(8.698,2.75) 90(8.698,3.25) 91(8.698,3.75) 92(8.698,4.25) 93(8.698,4.75) 94(8.698,5.25) 95(8.698,5.75) 96(8.698,6.25) 97(8.698,6.75) 98(8.698,7.25) 99(8.698,7.75) 100(8.698,8.25) 101(8.698,8.75) 102(8.698,9.25)
  oval 0.203x1.905 smd: 39(-6.249,-11.699) 40(-5.749,-11.699) 41(-5.249,-11.699) 42(-4.749,-11.699) 43(-4.249,-11.699) 44(-3.749,-11.699) 45(-3.249,-11.699) 46(-2.749,-11.699) 47(-2.249,-11.699) 48(-1.749,-11.699) 49(-1.249,-11.699) 50(-0.749,-11.699) 51(-0.249,-11.699) 52(0.25,-11.7) 53(0.75,-11.7) 54(1.25,-11.7) 55(1.75,-11.7) 56(2.25,-11.7) 57(2.75,-11.7) 58(3.25,-11.7) 59(3.75,-11.7) 60(4.25,-11.7) 61(4.75,-11.7) 62(5.25,-11.7) 63(5.75,-11.7) 64(6.25,-11.7) 103(6.251,11.699) 104(5.751,11.699) 105(5.251,11.699) 106(4.751,11.699) 107(4.251,11.699) 108(3.751,11.699) 109(3.251,11.699) 110(2.751,11.699) 111(2.251,11.699) 112(1.751,11.699) 113(1.251,11.699) 114(0.751,11.699) 115(0.251,11.699) 116(-0.248,11.7) 117(-0.748,11.7) 118(-1.248,11.7) 119(-1.748,11.7) 120(-2.248,11.7) 121(-2.748,11.7) 122(-3.248,11.7) 123(-3.748,11.7) 124(-4.248,11.7) 125(-4.748,11.7) 126(-5.248,11.7) 127(-5.748,11.7) 128(-6.248,11.7)
QFN064RCCS
  oval 0.203x1.397 smd: 1(-3.75,-4.775) 2(-3.25,-4.775) 3(-2.75,-4.775) 4(-2.25,-4.775) 5(-1.75,-4.775) 6(-1.25,-4.775) 7(-0.75,-4.775) 8(-0.25,-4.775) 9(0.25,-4.775) 10(0.75,-4.775) 11(1.25,-4.775) 12(1.75,-4.775) 13(2.25,-4.775) 14(2.75,-4.775) 15(3.25,-4.775) 16(3.75,-4.775) 33(3.75,4.775) 34(3.25,4.775) 35(2.75,4.775) 36(2.25,4.775) 37(1.75,4.775) 38(1.25,4.775) 39(0.75,4.775) 40(0.25,4.775) 41(-0.25,4.775) 42(-0.75,4.775) 43(-1.25,4.775) 44(-1.75,4.775) 45(-2.25,4.775) 46(-2.75,4.775) 47(-3.25,4.775) 48(-3.75,4.775)
  oval 1.397x0.203 smd: 17(4.775,-3.75) 18(4.775,-3.25) 19(4.775,-2.75) 20(4.775,-2.25) 21(4.775,-1.75) 22(4.775,-1.25) 23(4.775,-0.75) 24(4.775,-0.25) 25(4.775,0.25) 26(4.775,0.75) 27(4.775,1.25) 28(4.775,1.75) 29(4.775,2.25) 30(4.775,2.75) 31(4.775,3.25) 32(4.775,3.75) 49(-4.775,3.75) 50(-4.775,3.25) 51(-4.775,2.75) 52(-4.775,2.25) 53(-4.775,1.75) 54(-4.775,1.25) 55(-4.775,0.75) 56(-4.775,0.25) 57(-4.775,-0.25) 58(-4.775,-0.75) 59(-4.775,-1.25) 60(-4.775,-1.75) 61(-4.775,-2.25) 62(-4.775,-2.75) 63(-4.775,-3.25) 64(-4.775,-3.75)
  rect 5.21x5.21 smd: 65(0,0)
RRC0402RZCR
  rect 0.61x0.61 smd: 1(-0.508,0) 2(0.508,0)
RRC0805RZAR
  rect 1x1 smd: 1(-1.05,0) 2(1.05,0)
SMB
  rect 2.591x2.286 smd: 1(-1.968,0) 2(1.968,0)
SOC008RHAS
  rect 0.6x1.5 smd: 1(-1.905,-2.7) 2(-0.635,-2.7) 3(0.635,-2.7) 4(1.905,-2.7) 5(1.905,2.7) 6(0.635,2.7) 7(-0.635,2.7) 8(-1.905,2.7)
SOC008RHDR
  rect 0.6x1.5 smd: 1(-1.905,-3.6) 2(-0.635,-3.6) 3(0.635,-3.6) 4(1.905,-3.6) 5(1.905,3.6) 6(0.635,3.6) 7(-0.635,3.6) 8(-1.905,3.6)
SOT23RZAR-MOSFET
  rect 0.6x0.7 smd: D(0,1) G(-0.95,-1) S(0.95,-1)
SWC004RZBS
  rect 0.6x1.5 smd: 1(-0.635,-3.81) 2(0.635,-3.81) 3(0.635,3.81) 4(-0.635,3.81)
TERM2-3R96MM
  round 2.286 hole 1.524: 1(-1.98,0) 2(1.98,0)
TERM2-5R08MM
  round 2.286 hole 1.524: 1(-2.54,0) 2(2.54,0)
TQFP144
  oval 1.905x0.203 smd: 1(-11.2,8.75) 2(-11.2,8.25) 3(-11.2,7.75) 4(-11.2,7.25) 5(-11.2,6.75) 6(-11.2,6.25) 7(-11.2,5.75) 8(-11.2,5.25) 9(-11.2,4.75) 10(-11.2,4.25) 11(-11.2,3.75) 12(-11.2,3.25) 13(-11.2,2.75) 14(-11.2,2.25) 15(-11.2,1.75) 16(-11.2,1.25) 17(-11.2,0.75) 18(-11.2,0.25) 19(-11.2,-0.25) 20(-11.2,-0.75) 21(-11.2,-1.25) 22(-11.2,-1.75) 23(-11.2,-2.25) 24(-11.2,-2.75) 25(-11.2,-3.25) 26(-11.2,-3.75) 27(-11.2,-4.25) 28(-11.2,-4.75) 29(-11.2,-5.25) 30(-11.2,-5.75) 31(-11.2,-6.25) 32(-11.2,-6.75) 33(-11.2,-7.25) 34(-11.2,-7.75) 35(-11.2,-8.25) 36(-11.2,-8.75) 73(11.2,-8.75) 74(11.2,-8.25) 75(11.2,-7.75) 76(11.2,-7.25) 77(11.2,-6.75) 78(11.2,-6.25) 79(11.2,-5.75) 80(11.2,-5.25) 81(11.2,-4.75) 82(11.2,-4.25) 83(11.2,-3.75) 84(11.2,-3.25) 85(11.2,-2.75) 86(11.2,-2.25) 87(11.2,-1.75) 88(11.2,-1.25) 89(11.2,-0.75) 90(11.2,-0.25) 91(11.2,0.25) 92(11.2,0.75) 93(11.2,1.25) 94(11.2,1.75) 95(11.2,2.25) 96(11.2,2.75) 97(11.2,3.25) 98(11.2,3.75) 99(11.2,4.25) 100(11.2,4.75) 101(11.2,5.25) 102(11.2,5.75) 103(11.2,6.25) 104(11.2,6.75) 105(11.2,7.25) 106(11.2,7.75) 107(11.2,8.25) 108(11.2,8.75)
  oval 0.203x1.905 smd: 37(-8.75,-11.2) 38(-8.25,-11.2) 39(-7.75,-11.2) 40(-7.25,-11.2) 41(-6.75,-11.2) 42(-6.25,-11.2) 43(-5.75,-11.2) 44(-5.25,-11.2) 45(-4.75,-11.2) 46(-4.25,-11.2) 47(-3.75,-11.2) 48(-3.25,-11.2) 49(-2.75,-11.2) 50(-2.25,-11.2) 51(-1.75,-11.2) 52(-1.25,-11.2) 53(-0.75,-11.2) 54(-0.25,-11.2) 55(0.25,-11.2) 56(0.75,-11.2) 57(1.25,-11.2) 58(1.75,-11.2) 59(2.25,-11.2) 60(2.75,-11.2) 61(3.25,-11.2) 62(3.75,-11.2) 63(4.25,-11.2) 64(4.75,-11.2) 65(5.25,-11.2) 66(5.75,-11.2) 67(6.25,-11.2) 68(6.75,-11.2) 69(7.25,-11.2) 70(7.75,-11.2) 71(8.25,-11.2) 72(8.75,-11.2) 109(8.75,11.2) 110(8.25,11.2) 111(7.75,11.2) 112(7.25,11.2) 113(6.75,11.2) 114(6.25,11.2) 115(5.75,11.2) 116(5.25,11.2) 117(4.75,11.2) 118(4.25,11.2) 119(3.75,11.2) 120(3.25,11.2) 121(2.75,11.2) 122(2.25,11.2) 123(1.75,11.2) 124(1.25,11.2) 125(0.75,11.2) 126(0.25,11.2) 127(-0.25,11.2) 128(-0.75,11.2) 129(-1.25,11.2) 130(-1.75,11.2) 131(-2.25,11.2) 132(-2.75,11.2) 133(-3.25,11.2) 134(-3.75,11.2) 135(-4.25,11.2) 136(-4.75,11.2) 137(-5.25,11.2) 138(-5.75,11.2) 139(-6.25,11.2) 140(-6.75,11.2) 141(-7.25,11.2) 142(-7.75,11.2) 143(-8.25,11.2) 144(-8.75,11.2)
TSOT23-8
  rect 1.194x0.305 smd: 1(-1.3,0.975) 2(-1.3,0.325) 3(-1.3,-0.325) 4(-1.3,-0.975) 5(1.3,-0.975) 6(1.3,-0.325) 7(1.3,0.325) 8(1.3,0.975)
XTC004RZBR
  rect 1.35x1.6 smd: 1(-1.778,-1.27) 2(1.778,-1.27) 3(1.778,1.27) 4(-1.778,1.27)

## Nets
+3.3V: J4.18 J4.19 Q2.D
+3.3VAUX: C68.1 J4.17
+5V: C49.1 C60.1 J2.1 J3.1 Q1.G Q2.G R95.1 U2.2(IN) U2.8(EN)
GND: C3.2 C4.2 C5.2 C6.2 C7.2 C10.2 C13.2 C14.2 C19.2 C20.2 C21.2 C22.2 C23.2 C24.2 C25.2 C26.2 C27.2 C28.2 C29.2 C30.2 C31.2 C32.2 C33.2 C34.2 C35.2 C36.2 C37.2 C38.2 C41.2 C42.2 C43.2 C44.2 C45.2 C46.2 C47.2 C48.2 C49.2 C50.2 C51.2 C52.2 C53.2 C54.2 C55.2 C56.2 C57.2 C58.2 C59.2 C60.2 C61.2 C62.2 C63.2 C64.2 C65.2 C66.2 C67.2 C68.2 C69.2 C70.2 C71.2 C72.2 C73.2 C74.2 C75.2 C76.2 C77.2 C78.2 C79.2 C80.2 C81.2 C82.2 C83.2 C84.2 C85.2 C86.2 C87.2 C88.2 C89.2 C90.2 C91.2 C92.2 C93.2 C94.2 C95.2 C96.2 C97.2 C98.2 C99.2 C100.2 C101.2 C102.2 C103.2 C104.2 C105.2 C106.2 C107.2 C108.2 C109.2 C110.2 C111.2 C112.2 C113.2 C114.2 C115.2 C116.2 C117.2 C118.2 C119.2 C120.2 C121.2 C122.2 C123.2 C124.2 C125.2 C126.2 C127.2 C128.2 C129.2 C130.2 C131.2 C132.2 C133.2 C134.2 C135.2 C136.2 C137.2 C138.2 C139.2 C140.2 C141.2 C142.2 C143.2 C144.2 C145.2 C146.2 C147.2 C148.2 C149.2 C150.2 C151.2 C152.2 C153.2 C154.2 C155.2 C156.2 C157.2 C158.2 C159.2 C160.2 C161.2 C162.2 C163.2 C164.2 C165.2 C166.2 C167.2 C168.2 C169.2 C170.2 C171.2 C172.2 C173.2 C174.2 C175.2 C176.2 C177.2 C178.2 C179.2 C180.2 C181.2 C182.2 C183.2 C184.2 C185.2 C186.2 C187.2 C188.2 C189.2 C190.2 C191.2 C192.2 C193.2 C194.2 C195.2 C196.2 C197.2 C198.2 C199.2 C200.2 C201.2 C202.2 C203.2 C204.2 C205.2 J1.3 J1.5 J2.2 J3.2 J4.1 J4.4 J4.5 J4.8 J4.9 J4.12 J4.20 J4.21(S1) J4.22(S2) Q1.S R4.2 R9.2 R15.2 R18.2 R19.2 R20.2 R24.2 R25.2 R26.2 R27.2 R28.2 R33.2 R34.2 R35.2 R42.2 R43.2 R44.2 R53.2 R55.2 R76.1 R80.2 R81.2 R86.2 R89.1 R92.1 R100.1 R101.1 R118.1 U1.4(GND) U1.6(AGND) U2.4(GND) U2.6(AGND) U3.65(GND_PAD) U4.4(GND) U4.6(AGND) U5.4(GND) U5.6(AGND) U6.4(GND) U6.6(AGND) U7.1(VSS#1) U7.9(VSS#9) U7.15(VSS#15) U7.21(VSS#21) U7.22(VSS#22) U7.38(VSS#38) U7.40(VSS#40) U7.43(VSS#43) U7.45(VSS#45) U7.48(VSS#48) U7.51(VSS#51) U7.55(VSS#55) U7.58(VSS#58) U7.60(VSS#60) U7.63(VSS#63) U7.65(VSS#65) U7.66(VSS#66) U7.74(VSS#74) U7.83(VSS#83) U7.84(VSS#84) U7.88(CONFIG[0]) U7.93(VSS#93) U7.94(VSS#94) U7.101(VSS#101) U7.102(VSS#102) U7.103(VSS#103) U7.106(VSS#106) U7.108(VSS#108) U7.111(VSS#111) U7.116(VSS#116) U7.119(VSS#119) U7.127(VSS#127) U8.4(GND) U9.1(VSS#1) U9.9(VSS#9) U9.15(VSS#15) U9.21(VSS#21) U9.22(VSS#22) U9.38(VSS#38) U9.40(VSS#40) U9.43(VSS#43) U9.45(VSS#45) U9.48(VSS#48) U9.51(VSS#51) U9.55(VSS#55) U9.58(VSS#58) U9.60(VSS#60) U9.63(VSS#63) U9.65(VSS#65) U9.66(VSS#66) U9.74(VSS#74) U9.77(SEL_FREQ) U9.83(VSS#83) U9.84(VSS#84) U9.88(CONFIG[0]) U9.93(VSS#93) U9.94(VSS#94) U9.101(VSS#101) U9.102(VSS#102) U9.103(VSS#103) U9.106(VSS#106) U9.108(VSS#108) U9.111(VSS#111) U9.116(VSS#116) U9.119(VSS#119) U9.127(VSS#127) U10.1(VSS#1) U10.9(VSS#9) U10.15(VSS#15) U10.21(VSS#21) U10.22(VSS#22) U10.38(VSS#38) U10.40(VSS#40) U10.43(VSS#43) U10.45(VSS#45) U10.48(VSS#48) U10.51(VSS#51) U10.55(VSS#55) U10.58(VSS#58) U10.60(VSS#60) U10.63(VSS#63) U10.65(VSS#65) U10.66(VSS#66) U10.74(VSS#74) U10.77(SEL_FREQ) U10.83(VSS#83) U10.84(VSS#84) U10.88(CONFIG[0]) U10.93(VSS#93) U10.94(VSS#94) U10.101(VSS#101) U10.102(VSS#102) U10.103(VSS#103) U10.106(VSS#106) U10.108(VSS#108) U10.111(VSS#111) U10.116(VSS#116) U10.119(VSS#119) U10.127(VSS#127) U11.3(GND#3) U11.13(GND#13) U11.25(GND#25) U11.49(GND#49) U11.54(GND#54) U11.60(IO_L13P_M1_2) U11.68(GND#68) U11.73(SUSPEND) U11.77(GND#77) U11.91(GND#91) U11.96(GND#96) U11.108(GND#108) U11.113(GND#113) U11.130(GND#130) U11.136(GND#136) U12.4(GND) U13.4(VSS) U14.3 U14.4 Y1.2 Y1.4 Y2.2 Y2.4
VCC1V0: C7.1 C14.1 C19.1 C29.1 C30.1 C45.1 C48.1 C50.1 C51.1 C52.1 C61.1 C62.1 C79.1 C80.1 C82.1 C83.1 C91.1 C93.1 C97.1 C99.1 C105.1 C106.1 C107.1 C108.1 C110.1 C112.1 C117.1 C118.1 C119.1 C138.1 C139.1 C146.1 C147.1 C148.1 C149.1 C151.1 C152.1 C155.1 C157.1 C160.1 C161.1 C164.1 C165.1 C166.1 C167.1 C174.1 C175.1 C192.1 C193.1 C194.1 L4.2 R105.2 U3.4(VDD1P0#4) U3.11(VDD1P0#11) U3.18(VDD1P0#18) U3.27(VDD1P0#27) U3.37(VDD1P0#37) U3.41(VDD1P0#41) U3.60(VDD1P0#60) U5.5(OUT) U7.2(DVDD#2) U7.6(DVDD#6) U7.12(DVDD#12) U7.17(DVDD#17) U7.23(DVDD#23) U7.27(DVDD#27) U7.78(DVDD#78) U7.85(DVDD#85) U7.90(DVDD#90) U7.96(DVDD#96) U7.117(DVDD#117) U7.118(DVDD#118) U9.2(DVDD#2) U9.6(DVDD#6) U9.12(DVDD#12) U9.17(DVDD#17) U9.23(DVDD#23) U9.27(DVDD#27) U9.78(DVDD#78) U9.85(DVDD#85) U9.90(DVDD#90) U9.96(DVDD#96) U9.117(DVDD#117) U9.118(DVDD#118) U10.2(DVDD#2) U10.6(DVDD#6) U10.12(DVDD#12) U10.17(DVDD#17) U10.23(DVDD#23) U10.27(DVDD#27) U10.78(DVDD#78) U10.85(DVDD#85) U10.90(DVDD#90) U10.96(DVDD#96) U10.117(DVDD#117) U10.118(DVDD#118)
VCC1V2: C13.1 C22.1 C92.1 C98.1 C121.1 C127.1 C130.1 C134.1 C136.1 C154.1 C159.1 C170.1 C177.1 C183.1 L3.2 R104.2 U4.5(OUT) U11.1(IO_L83N_VREF_3) U11.19(VCCINT#19) U11.28(VCCINT#28) U11.34(IO_L1N_VREF_3) U11.52(VCCINT#52) U11.89(VCCINT#89) U11.104(IO_L1N_VREF_1) U11.120(IO_L62N_VREF_0) U11.128(VCCINT#128) U11.143(IO_L1N_VREF_0)
VCC1V9: C3.1 C5.1 C46.1 C47.1 C57.1 C59.1 C63.1 C64.1 C65.1 C66.1 C67.1 L1.2 R90.2 R98.1 R102.1 R110.1 R112.1 R116.1 R119.1 R125.1 R127.1 U1.5(OUT) U3.19(VDD1P9) U3.22(AVDD1P9#22) U3.44(AVDD1P9#44) U3.47(AVDD1P9#47) U3.51(AVDD1P9#51) U3.56(AVDD1P9#56) U3.61(AVDD1P9#61) U3.63(AVDD1P9#63)
VCC2V5: C4.1 C20.1 C21.1 C23.1 C24.1 C25.1 C26.1 C27.1 C31.1 C32.1 C33.1 C34.1 C35.1 C36.1 C37.1 C38.1 C76.1 C77.1 C78.1 C81.1 C84.1 C85.1 C87.1 C90.1 C96.1 C100.1 C101.1 C103.1 C104.1 C109.1 C111.1 C113.1 C115.1 C116.1 C120.1 C122.1 C123.1 C124.1 C125.1 C126.1 C128.1 C129.1 C131.1 C132.1 C133.1 C135.1 C137.1 C140.1 C141.1 C142.1 C143.1 C144.1 C145.1 C150.1 C153.1 C156.1 C158.1 C162.1 C163.1 C168.1 C169.1 C171.1 C172.1 C173.1 C176.1 C178.1 C179.1 C180.1 C182.1 C185.1 C186.1 C187.1 C188.1 C189.1 C190.1 C191.1 C195.1 J1.1 L5.2 R29.1 R30.1 R31.1 R36.1 R37.1 R38.1 R39.1 R40.1 R41.1 R85.1 R87.1 R97.1 R106.1 R107.1 R114.1 R115.1 R121.2 R122.1 R124.1 R129.1 U6.5(OUT) U7.5(VDDO#5) U7.11(VDDO#11) U7.30(VDDO#30) U7.34(VDDOX#34) U7.44(AVDD#44) U7.49(AVDD#49) U7.52(AVDD#52) U7.59(AVDD#59) U7.64(AVDD#64) U7.71(VDDOX#71) U7.73(VDDOH#73) U7.86(CONFIG[2]) U7.89(VDDOH#89) U7.97(VDDOH#97) U7.104(AVDD#104) U7.122(VDDO#122) U9.5(VDDO#5) U9.11(VDDO#11) U9.30(VDDO#30) U9.34(VDDOX#34) U9.44(AVDD#44) U9.49(AVDD#49) U9.52(AVDD#52) U9.59(AVDD#59) U9.64(AVDD#64) U9.71(VDDOX#71) U9.73(VDDOH#73) U9.82(CONFIG[3]) U9.86(CONFIG[2]) U9.89(VDDOH#89) U9.97(VDDOH#97) U9.104(AVDD#104) U9.122(VDDO#122) U10.5(VDDO#5) U10.11(VDDO#11) U10.30(VDDO#30) U10.34(VDDOX#34) U10.44(AVDD#44) U10.49(AVDD#49) U10.52(AVDD#52) U10.59(AVDD#59) U10.64(AVDD#64) U10.71(VDDOX#71) U10.73(VDDOH#73) U10.82(CONFIG[3]) U10.86(CONFIG[2]) U10.89(VDDOH#89) U10.97(VDDOH#97) U10.104(AVDD#104) U10.122(VDDO#122) U11.4(VCCO_3#4) U11.18(VCCO_3#18) U11.20(VCCAUX#20) U11.31(VCCO_3#31) U11.36(VCCAUX#36) U11.53(VCCAUX#53) U11.76(VCCO_1#76) U11.86(VCCO_1#86) U11.90(VCCAUX#90) U11.103(VCCO_1#103) U11.122(VCCO_0#122) U11.125(VCCO_0#125) U11.129(VCCAUX#129) U11.135(VCCO_0#135) U15.1(TCT1) U15.4(TCT2) U15.7(TCT3) U15.10(TCT4) U16.1(TCT1) U16.4(TCT2) U16.7(TCT3) U16.10(TCT4)
VCC3V3: C10.1 C28.1 C42.1 C43.1 C44.1 C58.1 C69.1 C70.1 C71.1 C73.1 C74.1 C89.1 C94.1 C114.1 C181.1 C184.1 C204.1 C205.1 J1.7 Q2.S Q3.S R3.1 R7.1 R8.1 R10.1 R11.1 R12.1 R13.1 R14.1 R16.1 R17.1 R21.1 R57.1 R58.1 R59.1 R60.1 R61.2 R62.1 R71.1 R72.1 R73.1 R74.1 R75.1 R82.1 R83.1 R84.1 R88.1 R91.1 R94.1 R96.1 R108.1 R109.1 R123.1 U1.2(IN) U3.1(AVDD3P3/VDD3P3) U3.10(VDD3P3#10) U3.32(VDD3P3#32) U4.2(IN) U4.8(EN) U5.2(IN) U6.2(IN) U6.8(EN) U8.1(VCC) U11.42(VCCO_2#42) U11.63(VCCO_2#63) U11.69(IO_L1N_M0_CMPMISO_2) U12.1(VCC) U13.8(VCC)
CLK125M: R32.1 U9.76(XTAL1) U10.76(XTAL1) U11.123(IO_L37N_GCLK12_0)
DC3V3: C6.1 C75.1 C86.1 L2.2 Q3.D R93.2 U2.5(OUT)
EEP_CSN: R7.2 U3.15(NVM_CS_N) U11.57(IO_L14N_D12_2)
EEP_MISO: U3.14(NVM_SO) U11.56(IO_L30P_GCLK1_D13_2)
EEP_MOSI: U3.12(NVM_SI) U11.58(IO_L14P_D11_2)
EEP_SCLK: R9.1 U3.13(NVM_SK) U11.59(IO_L13N_D10_2)
FLASH_CSN: R58.2 U11.38(IO_L65N_CSO_B_2) U13.1(S\)
FLASH_MISO: R59.2 U11.65(IO_L3P_D0_DIN_MISO_MISO1_2) U13.2(DQ1)
FLASH_MOSI: R73.2 U11.64(IO_L3N_MOSI_CSI_B_MISO0_2) U13.5(DQ0)
FLASH_SCLK: R72.2 U11.70(IO_L1P_CCLK_2) U13.6(C)
LED_X0: D13.A(ANODE) J6.1 J6.9(5) U11.48(IO_L48P_D7_2)
LED_X1: D12.A(ANODE) D16.A(ANODE) J6.3(2) U11.44(IO_L62P_D5_2)
LED_X2: D11.A(ANODE) D15.A(ANODE) J6.5(3) U11.45(IO_L49N_D4_2)
LED_X3: D10.A(ANODE) D14.A(ANODE) J6.7(4) U11.46(IO_L49P_D3_2)
LED_Y0: J6.2(6) J6.4(7) J6.6(8) J6.8(9) R79.2
LED_Y1: D14.K(CATHODE) D15.K(CATHODE) D16.K(CATHODE) J6.10 R78.2
LED_Y2: D10.K(CATHODE) D11.K(CATHODE) D12.K(CATHODE) D13.K(CATHODE) R77.2
MDI00N: C17.2 R125.2 U3.57(MDI_MINUS[0])
MDI00P: C18.2 R127.2 U3.58(MDI_PLUS[0])
MDI01N: C15.2 R116.2 U3.54(MDI_MINUS[1])
MDI01P: C16.2 R119.2 U3.55(MDI_PLUS[1])
MDI02N: C11.2 R110.2 U3.52(MDI_MINUS[2])
MDI02P: C12.2 R112.2 U3.53(MDI_PLUS[2])
MDI03N: C8.2 R98.2 U3.49(MDI_MINUS[3])
MDI03P: C9.2 R102.2 U3.50(MDI_PLUS[3])
MDI10N: J7.9(5) U16.22(MX1-)
MDI10P: J7.10 U16.23(MX1+)
MDI11N: J7.7(4) U16.19(MX2-)
MDI11P: J7.8(9) U16.20(MX2+)
MDI12N: J7.5(3) U16.16(MX3-)
MDI12P: J7.6(8) U16.17(MX3+)
MDI13N: J7.3(2) U16.13(MX4-)
MDI13P: J7.4(7) U16.14(MX4+)
MDI20N: J5.9(5) U15.22(MX1-)
MDI20P: J5.10 U15.23(MX1+)
MDI21N: J5.7(4) U15.19(MX2-)
MDI21P: J5.8(9) U15.20(MX2+)
MDI22N: J5.5(3) U15.16(MX3-)
MDI22P: J5.6(8) U15.17(MX3+)
MDI23N: J5.3(2) U15.13(MX4-)
MDI23P: J5.4(7) U15.14(MX4+)
PECN: R2.1 U3.25(PECLKN)
PECP: R1.1 U3.26(PECLKP)
PER0N: C2.2 J4.6
PER0P: C1.2 J4.7
PERN: R6.1 U3.23(PE_RN)
PERP: R5.1 U3.24(PE_RP)
PERST#: J4.14 U3.17(PE_RST_N)
PET0N: J4.10 R6.2
PET0P: J4.11 R5.2
PETN: C2.1 U3.20(PE_TN)
PETP: C1.1 U3.21(PE_TP)
PG1V0: R109.2 U5.1(PG)
PG1V2: R108.2 U4.1(PG)
PG1V9: R91.2 U1.1(PG) U5.8(EN)
PG2V5: R123.2 U1.8(EN) U6.1(PG)
PG3V3: R95.2 U2.1(PG)
PHY0_DUPLEX: U7.81(CONFIG[4]) U7.95(LED_DUPLEX)
PHY0_INT#: R31.2 U7.32(INTN) U11.118(IO_L63N_SCP6_0)
PHY0_LEDRX: U7.79(CONFIG[6]) U7.92(LED_RX)
PHY0_LINK10: U7.82(CONFIG[3]) U7.100(LED_LINK10)
PHY0_LINK100: U7.80(CONFIG[5]) U7.99(LED_LINK100)
PHY0_LINK1000: U7.87(CONFIG[1]) U7.98(LED_LINK1000)
PHY0_MDC: R29.2 U7.35(MDC) U11.114(IO_L65N_SCP2_0)
PHY0_MDIO: R30.2 U7.33(MDIO) U11.116(IO_L64N_SCP4_0)
PHY0_RESET#: R28.1 U7.36(RESETN) U11.111(IO_L66N_SCP0_0)
PHY0_RXCLK: U7.7(RX_CLK) U11.134(IO_L34P_GCLK19_0)
PHY0_RXCTL: U7.4(RX_DV) U11.137(IO_L4N_0)
PHY0_RXD0: U7.3(RXD[0]) U11.138(IO_L4P_0)
PHY0_RXD1: U7.128(RXD[1]) U11.142(IO_L2P_0)
PHY0_RXD2: U7.126(RXD[2]) U11.141(IO_L2N_0)
PHY0_RXD3: U7.125(RXD[3]) U11.140(IO_L3P_0)
PHY0_TXCLK: U7.14(GTX_CLK) U11.133(IO_L34N_GCLK18_0)
PHY0_TXCTL: U7.16(TX_EN) U11.132(IO_L35P_GCLK17_0)
PHY0_TXD0: U7.18(TXD[0]) U11.131(IO_L35N_GCLK16_0)
PHY0_TXD1: U7.19(TXD[1]) U11.127(IO_L36P_GCLK15_0)
PHY0_TXD2: U7.20(TXD[2]) U11.126(IO_L36N_GCLK14_0)
PHY0_TXD3: U7.24(TXD[3]) U11.124(IO_L37P_GCLK13_0)
PHY00N: C17.1 R124.2 R126.1 U7.42(MDI[0]-)
PHY00P: C18.1 R128.1 R129.2 U7.41(MDI[0]+)
PHY1_DET0: R23.2 R26.1 U11.5(IO_L52N_3)
PHY1_DET1: R22.2 R25.1 U11.2(IO_L83P_3)
PHY1_DUPLEX: U9.81(CONFIG[4]) U9.95(LED_DUPLEX)
PHY1_INT#: R38.2 U9.32(INTN) U11.12(IO_L49P_3)
PHY1_LEDRX: U9.79(CONFIG[6]) U9.92(LED_RX)
PHY1_LINK100: U9.80(CONFIG[5]) U9.99(LED_LINK100)
PHY1_LINK1000: U9.87(CONFIG[1]) U9.98(LED_LINK1000)
PHY1_MDC: R36.2 U9.35(MDC) U11.7(IO_L51N_3)
PHY1_MDIO: R37.2 U9.33(MDIO) U11.11(IO_L49N_3)
PHY1_RESET#: R35.1 U9.36(RESETN) U11.6(IO_L52P_3)
PHY1_RXCLK: U9.7(RX_CLK) U11.23(IO_L41N_GCLK26_3)
PHY1_RXCTL: U9.4(RX_DV) U11.24(IO_L41P_GCLK27_3)
PHY1_RXD0: U9.3(RXD[0]) U11.26(IO_L37N_3)
PHY1_RXD1: U9.128(RXD[1]) U11.33(IO_L2P_3)
PHY1_RXD2: U9.126(RXD[2]) U11.32(IO_L2N_3)
PHY1_RXD3: U9.125(RXD[3]) U11.30(IO_L36P_3)
PHY1_TXCLK: U9.14(GTX_CLK) U11.22(IO_L42P_GCLK25_TRDY2_3)
PHY1_TXCTL: U9.16(TX_EN) U11.21(IO_L42N_GCLK24_3)
PHY1_TXD0: U9.18(TXD[0]) U11.17(IO_L43P_GCLK23_3)
PHY1_TXD1: U9.19(TXD[1]) U11.16(IO_L43N_GCLK22_IRDY2_3)
PHY1_TXD2: U9.20(TXD[2]) U11.15(IO_L44P_GCLK21_3)
PHY1_TXD3: U9.24(TXD[3]) U11.14(IO_L44N_GCLK20_3)
PHY01N: C15.1 R115.2 R117.1 U7.47(MDI[1]-)
PHY01P: C16.1 R120.1 R122.2 U7.46(MDI[1]+)
PHY2_DET0: R53.1 R54.2 U11.75(IO_L74P_AWAKE_1)
PHY2_DET1: R55.1 R56.2 U11.74(IO_L74N_DOUT_BUSY_1)
PHY2_DUPLEX: U10.81(CONFIG[4]) U10.95(LED_DUPLEX)
PHY2_INT#: R39.2 U10.32(INTN) U11.83(IO_L45P_1)
PHY2_LEDRX: U10.79(CONFIG[6]) U10.92(LED_RX)
PHY2_LINK100: U10.80(CONFIG[5]) U10.99(LED_LINK100)
PHY2_LINK1000: U10.87(CONFIG[1]) U10.98(LED_LINK1000)
PHY2_MDC: R41.2 U10.35(MDC) U11.79(IO_L47P_1)
PHY2_MDIO: R40.2 U10.33(MDIO) U11.82(IO_L45N_1)
PHY2_RESET#: R42.1 U10.36(RESETN) U11.78(IO_L47N_1)
PHY2_RXCLK: U10.7(RX_CLK) U11.94(IO_L40N_GCLK10_1)
PHY2_RXCTL: U10.4(RX_DV) U11.95(IO_L40P_GCLK11_1)
PHY2_RXD0: U10.3(RXD[0]) U11.97(IO_L34N_1)
PHY2_RXD1: U10.128(RXD[1]) U11.102(IO_L32P_1)
PHY2_RXD2: U10.126(RXD[2]) U11.101(IO_L32N_1)
PHY2_RXD3: U10.125(RXD[3]) U11.100(IO_L33P_1)
PHY2_TXCLK: U10.14(GTX_CLK) U11.93(IO_L41P_GCLK9_IRDY1_1)
PHY2_TXCTL: U10.16(TX_EN) U11.92(IO_L41N_GCLK8_1)
PHY2_TXD0: U10.18(TXD[0]) U11.88(IO_L42P_GCLK7_1)
PHY2_TXD1: U10.19(TXD[1]) U11.87(IO_L42N_GCLK6_TRDY1_1)
PHY2_TXD2: U10.20(TXD[2]) U11.85(IO_L43P_GCLK5_1)
PHY2_TXD3: U10.24(TXD[3]) U11.84(IO_L43N_GCLK4_1)
PHY02N: C11.1 R107.2 R111.1 U7.57(MDI[2]-)
PHY02P: C12.1 R113.1 R114.2 U7.56(MDI[2]+)
PHY03N: C8.1 R97.2 R99.1 U7.62(MDI[3]-)
PHY03P: C9.1 R103.1 R106.2 U7.61(MDI[3]+)
PHY10N: R64.1 U8.7(1B) U9.42(MDI[0]-) U16.3(TD1-)
PHY10P: R63.1 U8.8(1A) U9.41(MDI[0]+) U16.2(TD1+)
PHY11N: R66.1 U8.5(2B) U9.47(MDI[1]-) U16.6(TD2-)
PHY11P: R65.1 U8.6(2A) U9.46(MDI[1]+) U16.5(TD2+)
PHY12N: R68.1 U9.57(MDI[2]-) U16.9(TD3-)
PHY12P: R67.1 U9.56(MDI[2]+) U16.8(TD3+)
PHY13N: R70.1 U9.62(MDI[3]-) U16.12(TD4-)
PHY13P: R69.1 U9.61(MDI[3]+) U16.11(TD4+)
PHY20N: R46.1 U10.42(MDI[0]-) U12.7(1B) U15.3(TD1-)
PHY20P: R45.1 U10.41(MDI[0]+) U12.8(1A) U15.2(TD1+)
PHY21N: R48.1 U10.47(MDI[1]-) U12.5(2B) U15.6(TD2-)
PHY21P: R47.1 U10.46(MDI[1]+) U12.6(2A) U15.5(TD2+)
PHY22N: R50.1 U10.57(MDI[2]-) U15.9(TD3-)
PHY22P: R49.1 U10.56(MDI[2]+) U15.8(TD3+)
PHY23N: R52.1 U10.62(MDI[3]-) U15.12(TD4-)
PHY23P: R51.1 U10.61(MDI[3]+) U15.11(TD4+)
REFCLKN: J4.2 R2.2
REFCLKP: J4.3 R1.2
SHIELD: C39.2 C40.2 C41.1 D4.1 D5.1 D6.1 D7.1 D8.1 D9.1 D17.1 D18.1 J5.1 J5.2(6) J7.1 J7.2(6) M3.1(PAD) M4.1(PAD) R76.2
SMB_CLK: J4.15 R96.2 U3.34(SMB_CLK)
SMB_DAT: J4.16 R94.2 U3.36(SMB_DAT)
SW0: R75.2 U11.40(IO_L64N_D9_2) U14.1
SW1: R74.2 U11.41(IO_L64P_D8_2) U14.2
TCK: J1.4 R86.1 U11.109(TCK)
TDI: J1.8 R87.2 U11.110(TDI)
TDO: J1.6 U11.106(TDO)
TMS: J1.2 R85.2 U11.107(TMS)
WAKE#: J4.13 U3.16(PE_WAKE_N/JTAG_TDO)
N67442: R12.2 U3.39(AUX_PWR/JTAG_TCK)
N67515: R10.2 U3.38(NVMT/JTAG_TMS)
N67584: R14.2 U3.40(JTAG_TDI)
N67696: R20.1 U3.2(NC_SI_CLK_IN)
N67737: R19.1 U3.3(NC_SI_CRS_DV)
N67772: R15.1 U3.7(NC_SI_TX_EN)
N67953: R16.2 U3.6(NC_SI_RXD0)
N67960: R17.2 U3.5(NC_SI_RXD1)
N68185: R11.2 U3.9(NC_SI_TXD0)
N68192: R13.2 U3.8(NC_SI_TXD1)
N16394177: D2.K(CATHODE) U3.31(LED0)
N16394189: D1.K(CATHODE) U3.30(LED1)
N16394201: D3.K(CATHODE) U3.33(LED2)
N16394589: R18.1 U3.48(RSET)
N16394967: R8.2 U3.35(SMB_ALRT_N)
N16397674: R3.2 U3.28(DEV_OFF_N)
N16397681: R21.2 U3.59(DIS_REG10)
N16742996: R4.1 U3.29(TEST_EN)
N16756763: R27.1 U7.37(COMA)
N16756919: R24.1 U7.39(RSET)
N16758110: C102.1 R126.2 R128.2
N16758335: C95.1 R117.2 R120.2
N16758537: C88.1 R111.2 R113.2
N16758742: C72.1 R99.2 R103.2
N16783000: R34.1 U9.37(COMA)
N16783038: R33.1 U9.39(RSET)
N16783366: C200.1 R63.2 R64.2
N16783392: C201.1 R65.2 R66.2
N16783433: C202.1 R67.2 R68.2
N16783479: C203.1 R69.2 R70.2
N16786649: C40.1 R131.2 R133.2 R135.2 R137.2
N16787073: D5.2 R131.1 U16.24(MCT1)
N16787087: D7.2 R133.1 U16.21(MCT2)
N16787092: D9.2 R135.1 U16.18(MCT3)
N16787097: D18.2 R137.1 U16.15(MCT4)
N16790710: R43.1 U10.37(COMA)
N16790739: R44.1 U10.39(RSET)
N16791034: C196.1 R45.2 R46.2
N16791069: C197.1 R47.2 R48.2
N16791108: C198.1 R49.2 R50.2
N16791147: C199.1 R51.2 R52.2
N16791700: C39.1 R130.2 R132.2 R134.2 R136.2
N16791719: D17.2 R136.1 U15.24(MCT1)
N16791723: D8.2 R134.1 U15.21(MCT2)
N16791727: D6.2 R132.1 U15.18(MCT3)
N16791731: D4.2 R130.1 U15.15(MCT4)
N16797384: R60.2 U13.3(W\/VPP/DQ2)
N16797386: R71.2 U13.7(H\O\L\D\/DQ3)
N16797549: R62.2 U11.37(PROGRAM_B_2)
N16797612: R61.1 U11.39(IO_L65P_INIT_B_2)
N16800576: R57.2 U11.71(DONE_2)
N16809006: R101.2 R105.1 U5.7(FB)
N16809082: L4.1 U5.3(SW)
N16809988: R100.2 R104.1 U4.7(FB)
N16810018: L3.1 U4.3(SW)
N16810666: R92.2 R93.1 U2.7(FB)
N16810690: L2.1 U2.3(SW)
N16812182: R118.2 R121.1 U6.7(FB)
N16812212: L5.1 U6.3(SW)
N16819619: R23.1 U8.2(1Y)
N16819626: R22.1 U8.3(2Y)
N16820789: R54.1 U12.2(1Y)
N16820791: R56.1 U12.3(2Y)
N16821830: D2.A(ANODE) R83.2
N16821835: D1.A(ANODE) R82.2
N16821840: D3.A(ANODE) R84.2
N16822404: C55.1 U7.76(XTAL1) Y2.1
N16822624: C56.1 U7.75(XTAL2) Y2.3
N16823123: R32.2 U7.31(125CLK)
N16826655: C54.1 U3.42(XTAL2) Y1.3
N16826658: C53.1 U3.43(XTAL1) Y1.1
N16920229: R79.1 U11.43(IO_L62N_D6_2)
N16920325: R78.1 U11.47(IO_L48N_RDWR_B_VREF_2)
N16920444: R77.1 U11.50(IO_L31N_GCLK30_D15_2)
N16928168: M1.1(PAD) R80.1
N16928171: M2.1(PAD) R81.1
N16950732: R89.2 R90.1 U1.7(FB)
N16950756: L1.1 U1.3(SW)
N16969273: Q1.D Q3.G R88.2

Pads without a net: FM1 1; FM2 1; FM3 1; FM4 1; U3 45 46 62 64; U7 8 10 13 25 26 28 29 50 53 54 67 68 69 70 72 77 91 105 107 109 110 112 113 114 115 120 121 123 124; U9 8 10 13 25 26 28 29 31 50 53 54 67 68 69 70 72 75 91 100 105 107 109 110 112 113 114 115 120 121 123 124; U10 8 10 13 25 26 28 29 31 50 53 54 67 68 69 70 72 75 91 100 105 107 109 110 112 113 114 115 120 121 123 124; U11 8 9 10 27 29 35 51 55 61 62 66 67 72 80 81 98 99 105 112 115 117 119 121 139 144

## Via types
v1: diameter 0.61, hole 0.305, TOP to BOTTOM, 682 vias
v2: diameter 1.27, hole 0.711, TOP to BOTTOM, 62 vias
v3: diameter 2.286, hole 1.524, TOP to BOTTOM, 2 vias

## Routing (per net, layer and track width the routed paths; a pad name or vN(x,y) marks a point on that pad's centre or on a via; arc(x,y) is an arc through that point)
+3.3V: length 5.6
  TOP w0.254: J4.19 v1(84.89,7.2) ; J4.18 v1(83.89,7.2)
  BOTTOM w0.254: Q2.D 93.54,58.97 ; Q2.D 93.03,58.42 ; Q2.D 93.54,57.86 ; Q2.D 94.04,58.42
  vias: v1(94.81,58.81) v1(94.81,58.05) v1(95.57,58.81) v1(95.57,58.05)
+3.3VAUX: length 4.2
  TOP w0.152: J4.17 v1(82.89,7.2)
  BOTTOM w0.152: C68.1 82.89,6.34 v1(82.89,7.2)
+5V: length 37.7
  TOP w0.152: v1(88.13,72.41) 87.82,72.72 87.82,73.01 87.48,73.35 U2.8
  TOP w0.254: U2.2 v1(88.13,72.41)
  BOTTOM w0.152: 98.3,56.47 98.3,58.88 96.81,60.36 95.87,60.36 95.14,61.1 95.14,65.85 94.42,66.56 90.33,66.56 ; 98.3,56.47 97.6,57.16 95.18,57.16 94.49,56.47 Q2.G ; 98.3,56.47 Q1.G ; 86.3,71.64 85.75,71.64 85.63,71.51 82.74,71.51 R95.1
  BOTTOM w0.254: v1(88.13,72.41) 88.13,71.85
  BOTTOM w0.508: 86.55,65.75 J3.1 87.9,64.4 ; 89.02,71.61 C49.1 89.73,70.9 ; 87.19,70.9 C60.1 ; C60.1 86.48,71.61 ; C60.1 87.89,71.61 ; 90.36,65.19 J2.1 89.01,63.84
GND: length 792.6
  TOP w0.152: R25.2 v1(61.15,56.78) ; Y2.2 88.82,40.27 v1(88.33,39.78) ; R18.2 v1(85.58,30.73) ; U10.60 33.15,8.08 32.84,8.39 32.19,8.39 v1(31.69,7.89) ; R43.2 v1(36.91,25.45) ; R42.2 v1(38.41,25.45) ; R24.2 v1(64.34,25.49) ; v1(87.31,35.99) 86.82,35.49 Y1.4 ; U10.45 33.16,15.58 32.94,15.8 32.94,15.89 ; U10.58 33.14,9.08 32.73,8.67 32.05,8.67 v1(31.69,9.03) ; R55.2 v1(29.4,30.75) ; 27.5,47.26 v1(26.29,47.26) ; U10.43 33.13,16.58 32.93,16.38 32.93,15.9 32.94,15.89 ; U11.25 42.66,48.6 v1(42.74,48.53) ; 32.94,15.89 v1(31.94,15.89) ; U9.60 56,69.92 v1(55.94,69.86) ; 58.48,56.78 v1(59.25,56.78) ; v1(31.94,19.32) 31.94,18.81 32.32,18.43 32.84,18.43 33.19,18.08 U10.40 ; U9.88 43.66,72.87 v1(43.88,72.66) ; v1(87.31,43.3) 86.82,42.81 Y2.4 ; v1(88.33,32.46) 88.82,32.95 Y1.2 ; R15.2 v1(86.82,12.2) ; J4.22 v3(88.2,3.72) ; R9.2 v1(89.82,12.2) ; U10.55 33.17,10.58 32.61,11.14 v1(32.58,11.14) ; R4.2 v1(98.09,26.22) ; R53.2 v1(29.4,28.21) ; R27.2 v1(60.07,30.74) R28.2 ; R35.2 v1(54.15,53.16) R34.2 ; R44.2 v1(33.4,22.1) ; J4.21 v3(64.58,3.72) ; U10.63 33.18,6.58 32.94,6.34 32.93,6.34 v1(32.58,5.98) ; U14.3 v1(26.29,45.99) ; v1(32.58,13.47) 33.18,14.08 U10.48 ; R26.2 v1(61.15,59.32)
  TOP w0.203: v1(35.88,70.62) 35.88,70.58 35.73,70.42 U9.106 ; 50.95,4.75 50.99,4.8 v1(50.99,5.35) ; 50.95,4.75 50.93,4.75 50.66,4.48 U10.93 ; 50.95,4.75 51.16,4.54 U10.94 ; v1(59.12,62.5) 59.04,62.42 U9.45 ; U10.108 v1(59.02,8.58) ; v1(55.78,65.83) 56.19,65.42 U9.51 ; U9.66 v1(54.66,75.78) ; U10.1 55.16,22.26 v1(54.8,22.62) ; 79.93,38.75 80.43,39.25 U7.84 ; 79.93,38.75 U7.83 ; 79.93,38.75 79.7,38.75 v1(79.57,38.62) ; v1(70.93,25.79) 70.83,25.89 U7.48 ; U9.48 56.48,63.92 56.12,63.56 v1(56.1,63.56) ; U10.106 v1(59.02,7.58) ; v1(55.94,67.2) 56.17,67.42 U9.55 ; U9.127 33.25,59.92 33.22,59.96 v1(32.7,59.96) ; v1(62.29,48.02) 62.53,48.25 U7.1 ; U7.93 v1(82.69,43.75) 82.69,44.01 82.44,44.25 U7.94 ; U11.91 46.16,28.96 46.55,29.35 v1(46.55,29.48) ; U7.15 65.38,41.25 v1(65.47,41.16) ; U9.40 55.98,59.92 v1(55.94,59.96) ; U7.116 v1(72.33,52.11) ; U9.102 v1(36.66,72.96) ; U9.101 v1(37.16,75.78) ; v1(48.2,5.47) 48.2,4.97 48.16,4.93 U10.88 ; v1(41.08,2.04) 41.16,2.12 U10.74 ; U11.13 48.66,48.57 v1(48.7,48.53) ; U10.116 v1(59.02,12.58) ; U11.60 36.21,36.25 36.39,36.08 v1(36.39,35.95) ; U9.103 v1(32.8,71.92) ; U9.43 56.52,61.42 56.2,61.1 v1(55.94,61.1) ; U7.88 79.78,41.25 v1(79.57,41.03) ; U11.136 55.64,43.75 v1(55.44,43.95) ; U7.66 80.2,30.25 ; 80.2,30.25 79.94,30.51 79.94,30.75 v1(79.57,31.13) ; 80.2,30.25 80.19,30.25 80.19,29.99 80.43,29.75 U7.65 ; v1(43.09,2.04) 42.66,2.47 U10.77 ; U7.58 75.83,25.85 v1(75.88,25.79) ; U9.108 35.81,69.42 v1(35.88,69.35) ; U10.65 36.66,5.11 36.77,5.22 v1(36.89,5.22) ; U7.60 76.83,25.85 v1(76.77,25.79) ; v1(65.47,44.22) 65.33,44.22 65.3,44.25 U7.9 ; U9.119 33.05,63.92 32.96,64.02 v1(32.7,64.02) ; v1(40.58,58.69) 40.66,58.6 U9.9 ; U9.74 v1(50.66,75.78) ; U11.108 54.66,26.31 v1(54.67,26.3) ; v1(65.47,31) 65.47,30.24 64.98,29.75 U7.38 ; U11.73 37.16,29.36 v1(37.27,29.48) ; v1(32.7,65.54) 32.82,65.42 U9.116 ; v1(45.28,19.44) 45.16,19.56 U10.21 ; U7.106 v1(77.33,52.11) ; U7.111 v1(74.83,52.11) ; v1(72.33,25.79) 72.33,25.8 U7.51 ; v1(46.8,55.51) 46.66,55.65 U9.21 ; v1(79.57,34.43) 80.07,34.43 80.12,34.39 80.13,34.39 80.27,34.25 U7.74 ; U10.102 v1(55.16,2.22) ; U11.96 48.66,29.27 48.58,29.35 v1(48.58,29.48) ; v1(51.37,19.44) 51.16,19.66 U10.9 ; v1(43.62,58.69) 43.62,58.18 43.66,58.14 U9.15 ; U9.111 v1(32.8,67.92) ; U7.21 65.33,38.25 65.34,38.24 v1(65.47,38.24) 65.21,37.99 64.97,37.99 64.73,37.75 U7.22 ; U9.84 45.66,73.16 46.04,72.78 v1(46.04,72.66) 46.16,72.78 U9.83 ; U11.54 35.75,39.25 35.9,39.1 36.18,39.1 v1(36.41,38.87) ; v1(48.32,19.44) 48.16,19.61 U10.15 ; U7.55 74.33,25.87 v1(74.26,25.79) ; v1(39.43,29.48) 39.31,29.48 39.16,29.33 U11.77 ; U9.94 40.66,72.83 v1(40.83,72.66) 41.03,72.86 41.03,73.1 41.16,73.23 U9.93 ; U9.65 55.16,73.19 55.18,73.16 v1(55.18,72.66) ; U7.119 v1(70.83,52.11) ; U9.1 v1(36.66,55.56) ; v1(55.44,32.02) 55.67,32.25 U11.113 ; U9.77 v1(49.16,75.78) ; U10.103 v1(59.02,6.08) ; v1(55.44,40.98) 55.51,40.91 55.69,40.91 55.84,40.75 U11.130 ; U10.38 v1(36.66,19.62) ; v1(78.42,25.79) 78.33,25.89 U7.63 ; U7.108 v1(76.33,52.11) ; U11.49 35.92,41.75 36,41.67 v1(36.39,41.67) ; v1(37.15,2.04) 37.16,2.06 U10.66 ; v1(53.66,48.53) 53.66,49.03 53.66,49.04 U11.3 ; v1(68.39,25.79) 68.33,25.85 U7.43 ; U7.101 79.68,47.75 v1(79.57,47.64) ; U10.83 45.66,4.48 45.88,4.7 45.88,4.86 ; U9.38 55.16,58.58 v1(55.05,58.69) ; U9.58 58.69,68.92 59.18,69.41 v1(59.65,69.41) ; U10.51 32.58,12.58 v1(32.58,12.59) ; 45.88,4.86 45.94,4.8 45.94,4.7 46.16,4.48 U10.84 ; 45.88,4.86 v1(45.5,5.24) ; U9.22 47.16,58.33 v1(46.8,58.69) ; v1(59.54,71.98) 59.2,71.98 58.65,71.42 U9.63 ; U7.45 69.33,25.85 v1(69.28,25.79) ; U7.127 v1(66.83,52.11) ; U11.68 35.73,32.25 35.88,32.4 36.01,32.4 v1(36.39,32.78) ; U10.22 v1(44.66,22.44) ; U10.101 54.66,4.83 54.67,4.84 v1(54.67,5.35) ; U10.127 v1(59.02,18.08) ; U10.111 v1(59.02,10.08) ; U7.102 v1(82.69,48.25) ; U7.40 66.83,25.89 v1(66.74,25.79) ; U10.119 v1(59.02,14.08) ; U7.103 v1(78.83,52.11)
  TOP w0.254: U1.4 97.69,48.74 97.98,49.03 v1(97.98,49.25) 97.44,49.25 97.04,49.66 U1.6 96.93,49.66 ; U1.4 98.04,47.86 ; U1.4 97.69,47.06 ; U7.103 79.14,50.7 ; 85.16,35.49 Y1.4 ; Y1.4 86.04,36.5 ; Y1.4 86.04,34.49 ; C33.2 31.18,19.83 ; C33.2 v1(31.94,19.32) ; C33.2 31.18,18.81 ; 36.86,75.53 U9.101 ; U8.4 66.39,68.08 ; U8.4 67.34,67.58 ; U8.4 v1(65.18,67.58) ; U8.4 66.39,67.07 ; C31.2 31.18,12.21 ; C31.2 31.18,11.19 ; C31.2 v1(31.94,11.7) ; 27.5,47.26 28.45,47.26 ; 27.5,47.26 27.5,46.75 ; 27.5,47.26 27.5,47.76 ; v1(31.94,15.89) 31.56,15.51 C32.2 ; 78.3,70.25 C6.2 ; C6.2 78.3,72.26 ; C6.2 76.75,71.26 ; C6.2 79.85,71.26 ; J1.5 98.95,39 ; J1.5 97.98,39.97 ; J1.5 97.98,38.04 ; J1.5 97.01,39 ; J4.21 65.8,5.98 ; J4.21 63.36,5.98 ; J4.21 64.58,7.71 ; U9.21 46.97,55.82 ; C28.2 33.91,53.76 ; C28.2 33.91,52.35 ; C28.2 33.2,53.06 ; C32.2 31.18,16.02 ; C32.2 31.18,15 ; U7.84 82.43,39.25 ; 85.16,42.81 Y2.4 ; Y2.4 86.04,41.81 ; Y2.4 86.04,43.82 ; 40.66,55.81 U9.9 ; U4.4 82.17,56.12 ; U4.4 81.81,55.32 ; U4.4 81.81,57.21 v1(82.11,57.51) 81.57,57.51 81.16,57.92 U4.6 81.06,57.92 ; 77.11,13.17 C7.2 77.82,13.87 ; U13.4 v1(26.08,40.91) ; U13.4 28.24,40.91 ; U13.4 27.29,40.4 ; 26.39,33.29 v1(25.18,33.29) ; 26.39,33.29 26.39,32.78 ; 26.39,33.29 27.34,33.29 ; 26.39,33.29 26.39,33.79 ; 13.17,32.78 C41.2 10.07,32.78 ; C23.2 60.67,3.33 ; C23.2 59.26,3.33 ; C23.2 59.96,2.63 ; C3.2 88.1,47.76 ; C3.2 86.55,46.76 ; C3.2 85,47.76 ; C36.2 v1(31.94,56.15) ; C36.2 31.18,56.66 ; C36.2 31.18,55.64 ; 58.48,56.27 58.48,57.29 ; v1(77.89,10.66) J4.12 77.89,7.46 ; 90.36,58.54 J2.2 ; J2.2 90.36,61.23 ; J2.2 89.01,59.88 ; J2.2 91.71,59.88 ; J4.4 v1(69.89,10.66) ; J4.4 70.35,8.93 ; J4.4 69.89,7.46 ; C27.2 33.91,25.65 ; C27.2 33.91,24.24 ; C27.2 33.2,24.95 ; J4.22 88.2,7.71 ; J4.22 86.98,5.98 ; J4.22 89.42,5.98 ; 57.61,5.78 U10.103 ; C13.2 70.68,57.02 ; C13.2 72.23,56.02 ; C13.2 70.68,55.01 ; C13.2 69.13,56.02 ; 61.91,59.83 R26.2 61.91,58.81 ; 62.87,53.06 C19.2 ; C19.2 63.58,53.76 ; C19.2 63.58,52.35 ; 83.82,12.2 R19.2 v1(83.33,12.71) R20.2 82.82,12.2 ; C24.2 58.57,74.67 ; C24.2 57.16,74.67 ; C24.2 57.86,75.38 ; 79.82,12.47 C5.2 ; C5.2 79.11,13.17 ; C5.2 79.82,13.87 ; C5.2 80.52,13.17 ; U7.102 81.28,48.56 ; 59.56,31.5 R28.2 ; 36.86,27.8 U11.73 ; 57.21,24.95 C25.2 ; C25.2 57.91,24.24 ; C25.2 57.91,25.65 ; 54.66,2.48 U10.101 ; 55.47,56.97 U9.38 55.16,55.82 ; 70.68,63.27 C14.2 ; C14.2 69.13,64.27 ; C14.2 70.68,65.28 ; C14.2 72.23,64.27 ; 85.2,59.32 J3.2 ; J3.2 87.9,59.32 ; J3.2 86.55,57.97 ; J3.2 86.55,60.67 ; 16.13,32.43 R76.1 14.73,32.43 ; C21.2 59.91,25.65 ; C21.2 59.91,24.24 ; C21.2 59.21,24.95 ; 89.43,70.56 U2.4 ; U2.4 89.43,72.23 89.73,72.53 v1(89.73,72.75) 89.19,72.75 88.78,73.16 U2.6 88.68,73.16 ; U2.4 89.79,71.36 ; J1.3 98.95,36.46 ; J1.3 97.98,35.5 ; J1.3 97.98,37.43 ; 86.57,12.2 R15.2 ; C34.2 31.18,23.64 ; C34.2 31.18,22.62 ; C34.2 v1(31.94,23.13) ; v1(66.89,10.66) J4.1 67.35,7.46 ; U10.21 45.16,22.19 ; J4.5 v1(70.89,10.66) ; J4.5 70.43,8.93 ; J4.5 70.89,7.46 ; 36.66,75.53 U9.102 36.36,74.37 ; C26.2 57.91,53.76 ; C26.2 58.62,53.06 ; C26.2 57.91,52.35 ; 47.16,55.82 U9.22 ; 59.21,53.06 C22.2 ; C22.2 59.91,53.76 ; C22.2 59.91,52.35 ; C20.2 64.61,71.26 ; C20.2 63.06,72.26 ; C20.2 63.06,70.25 ; C20.2 61.51,71.26 ; 75.82,13.87 C10.2 75.11,13.17 ; C35.2 31.18,52.85 ; C35.2 31.18,51.83 ; C35.2 v1(31.94,52.34) ; C4.2 82.29,53.06 ; C4.2 81.58,53.76 ; C4.2 81.58,52.35 ; 89.57,12.2 R9.2 ; Y1.2 90.48,32.95 ; Y1.2 89.6,31.95 ; Y1.2 89.6,33.96 ; U9.60 58.77,69.92 ; 30.16,28.72 R53.2 30.16,27.7 ; U3.65 90.63,24.03 ; 36.66,22.19 U10.38 36.36,21.03 ; 63.07,25.49 R24.2 63.58,24.98 ; 31.18,59.45 C37.2 ; C37.2 31.18,60.47 ; C37.2 v1(31.94,59.96) ; U7.101 82.43,47.75 ; v1(85.89,7.2) J4.20 85.66,7.46 ; 30.16,31.26 R55.2 30.16,30.24 ; 31.15,74.67 C30.2 ; C30.2 31.86,75.38 ; C30.2 32.56,74.67 ; 81.06,66.17 U5.6 81.16,66.17 81.57,65.76 v1(82.11,65.76) 81.81,65.47 U5.4 ; 74.89,7.46 J4.9 ; J4.9 v1(74.89,10.66) ; J4.9 74.43,8.93 ; U9.66 54.96,75.53 ; 36.66,2.48 U10.65 36.36,3.63 ; U11.108 54.97,27.8 ; 36.86,2.48 U10.66 ; C29.2 32.56,3.33 ; C29.2 31.86,2.63 ; C29.2 31.15,3.33 ; 33.06,69.42 U9.108 ; 55.46,74.37 U9.65 55.16,75.53 ; 74.19,70.56 U6.4 ; U6.4 74.19,72.23 74.49,72.53 v1(74.49,72.75) 73.95,72.75 73.54,73.16 U6.6 73.44,73.16 ; U6.4 74.55,71.36 ; Y2.2 90.48,40.27 ; Y2.2 89.6,41.28 ; Y2.2 89.6,39.27 ; U5.4 82.17,64.37 ; U5.4 81.81,63.57 ; U7.93 82.43,44.06 ; 36.36,56.97 U9.1 ; J4.8 v1(73.89,10.66) ; J4.8 73.89,7.46 ; J4.8 74.35,8.93 ; U10.22 44.97,22.19 ; U9.40 58.77,59.92 ; 32.89,21.33 R44.2 33.4,20.83 ; 59.56,30.51 R27.2 ; U11.130 58.27,40.75 ; 46.16,26.65 U11.91 ; 36.4,24.84 R43.2 ; 61.91,56.27 R25.2 61.91,57.29 ; U7.83 82.44,39.06 ; U9.103 34.21,72.23 ; C38.2 v1(31.92,63.77) ; C38.2 31.18,63.26 ; C38.2 31.18,64.28 ; U10.9 51.16,22.19 ; 27.5,46.49 U14.3 28.45,45.99 ; 62.72,44.25 U7.9 ; 33.06,70.42 U9.106 ; U7.94 82.43,43.95 ; U10.102 55.47,3.63 ; R18.2 84.82,31.24
  TOP w0.508: C23.2 v1(59.96,4.29) ; C27.2 v1(34.86,24.95) ; C22.2 v1(60.87,53.06) ; C24.2 v1(57.86,73.72) ; C28.2 v1(34.86,53.06) ; C4.2 v1(80.63,53.06) ; C25.2 v1(58.87,24.95) ; C7.2 v1(78.62,13.17) ; C5.2 80.07,12.91 v1(80.07,12.31) ; C29.2 v1(31.86,4.29) ; C30.2 v1(31.86,73.72) ; C19.2 v1(64.54,53.06) ; C41.2 v1(11.62,34.04) ; C10.2 v1(76.62,13.17) ; C26.2 v1(56.96,53.06) ; R76.1 v1(15.43,33.39) ; C21.2 v1(60.87,24.95)
  L2_GND w0.254: J1.3 98.88,36.46 ; J1.3 97.98,37.36 ; J1.3 97.08,36.46 ; J1.3 97.98,35.56 ; 89.01,59.88 J2.2 ; J2.2 90.36,61.23 ; J2.2 91.71,59.88 ; J2.2 90.36,58.54 ; J1.5 97.98,39.9 ; J1.5 97.08,39 ; J1.5 97.98,38.1 ; J1.5 98.88,39 ; 86.55,57.97 J3.2 ; J3.2 85.2,59.32 ; J3.2 86.55,60.67 ; J3.2 87.9,59.32
  BOTTOM w0.152: R92.1 v1(85.41,73.16) ; R118.1 v1(70.17,73.16) ; R101.1 v1(77.79,66.18) ; R89.1 v1(93.66,49.67) ; R86.2 v1(93.54,38.37) ; R100.1 v1(77.79,57.92)
  BOTTOM w0.254: 37.9,60.42 C180.2 ; C180.2 v1(37.67,60.68) C194.2 36.4,60.68 ; C180.2 C175.2 ; 69.41,65.33 C99.2 69.41,63.92 ; C117.2 55.42,17.33 ; C117.2 54.4,17.33 ; C117.2 v1(54.91,16.56) ; R81.2 97.35,65.96 ; R81.2 98.05,65.26 ; R81.2 97.35,64.55 ; C51.2 88.8,19.73 88.81,19.72 C46.2 ; C51.2 C52.2 ; C51.2 C58.2 ; 51.9,17.33 C138.2 v1(52.41,16.56) ; 53.9,65.66 C124.2 ; C124.2 53.9,66.68 ; C124.2 v1(53.14,66.17) ; C150.2 47.92,7.34 ; C150.2 46.9,7.34 ; C150.2 v1(47.41,8.1) ; 67.59,44.99 C110.2 v1(68.35,45.5) ; 45.4,45.99 C154.2 v1(45.91,45.73) ; 77.57,31.99 C77.2 v1(76.81,32.5) ; 38.42,39.49 C182.2 v1(39.18,40) ; 77.07,46 C84.2 v1(76.81,46.5) ; 68.9,73.16 R118.1 69.41,73.67 ; 39.4,45.99 C173.2 v1(39.91,45.73) ; 46.9,17.33 C151.2 ; C151.2 47.92,17.33 ; C151.2 v1(47.41,16.56) ; 54.16,69.68 C125.2 v1(53.9,69.93) ; 53.4,38.99 C130.2 v1(52.64,39.5) ; 68.57,31.01 C100.2 ; C100.2 69.59,31.01 ; C100.2 v1(69.08,31.77) ; 77.73,71.61 C86.2 77.03,72.31 ; C48.2 89.31,22.2 89.32,22.21 C50.2 ; C48.2 C63.2 ; C48.2 C47.2 ; C132.2 v1(52.64,43) ; C132.2 53.4,42.49 ; C132.2 53.4,43.51 ; C120.2 53.9,15.84 ; C120.2 53.9,14.82 ; C120.2 v1(53.14,15.33) ; v1(68.35,43.5) C109.2 67.59,44.01 ; C105.2 67.59,36.01 ; C105.2 v1(68.35,35.5) ; C105.2 67.59,34.99 ; 53.9,72.18 C126.2 v1(53.14,71.67) ; 54.92,46.5 C121.2 v1(54.41,45.73) ; 39.4,7.34 C172.2 v1(39.91,8.1) ; C147.2 v1(49.41,61.44) ; C147.2 48.9,60.68 ; C147.2 49.92,60.68 ; 68.1,47.01 C111.2 v1(68.35,46.5) ; 51.4,31.51 C140.2 v1(51.91,32.27) ; 71.95,63.92 C93.2 71.95,65.33 ; 73.78,73.71 C89.2 ; C89.2 74.49,74.41 ; C89.2 75.19,73.71 ; 87.12,48.11 C57.2 ; C57.2 87.82,48.82 ; C57.2 87.82,47.41 ; 42.9,31.51 C162.2 v1(43.41,32.27) ; 53.42,7.34 C135.2 v1(52.91,8.1) ; v1(70.93,25.79) 71.58,25.14 C95.2 71.07,24.51 ; 23.18,39.51 C205.2 ; C205.2 v1(24.45,39.51) ; C205.2 23.69,40.02 ; 37.92,11.32 C188.2 ; C188.2 v1(38.68,11.83) ; C188.2 37.92,12.34 ; C190.2 37.92,14.75 37.91,14.74 v1(37.91,14.6) ; C190.2 38.42,15.33 ; C190.2 37.92,15.84 ; v1(53.14,13.83) C119.2 53.9,14.34 ; 38.42,65.18 C192.2 v1(38.68,64.67) ; v1(53.14,12.83) C118.2 53.9,12.32 ; C107.2 v1(68.35,40.5) ; C107.2 67.59,39.99 ; C107.2 67.59,41.01 ; C80.2 v1(76.81,39.5) ; C80.2 77.57,38.99 ; C80.2 77.57,40.01 ; C101.2 v1(69.08,46.23) ; C101.2 69.59,47 ; C101.2 68.57,47 ; v1(39.18,41) C183.2 38.42,41.51 ; C167.2 42.42,17.33 ; C167.2 41.4,17.33 ; C167.2 v1(41.91,16.56) ; v1(51.91,8.1) C139.2 51.4,7.34 ; v1(38.91,69.9) C178.2 38.4,70.67 ; 44.9,70.67 C157.2 ; C157.2 v1(45.41,69.9) ; C157.2 45.92,70.67 ; 87.19,74.41 C60.2 87.89,73.71 ; v1(46.91,45.73) C153.2 47.42,46.5 ; v1(50.41,16.56) C145.2 50.92,17.33 ; 40.42,70.67 C174.2 v1(39.91,69.9) ; Q1.S v1(96.4,55.61) ; 86.8,42.54 C56.2 ; C56.2 v1(87.31,43.3) ; C56.2 87.31,42.03 ; C175.2 39.92,60.93 ; C175.2 v1(40.17,60.68) ; C160.2 44.92,60.68 ; C160.2 v1(44.41,61.44) ; C160.2 43.9,60.68 ; v1(52.64,40.5) C131.2 53.4,41.01 ; C171.2 v1(40.41,16.56) ; C171.2 39.9,17.33 ; C171.2 40.92,17.33 ; C184.2 v1(39.18,45) ; C184.2 38.42,45.51 ; C184.2 38.42,44.49 ; 43.92,70.67 C163.2 v1(43.41,69.9) ; C94.2 72.65,73.71 ; 29.91,53.1 C200.2 ; C64.2 C65.2 86.33,24.23 86.16,24.4 86.04,24.4 85.79,24.65 v1(85.66,24.65) ; C64.2 C63.2 ; C64.2 86.84,22.72 86.84,22.71 C59.2 ; C96.2 v1(71.08,31.77) ; C96.2 70.57,31.01 ; C96.2 71.59,31.01 ; 77.03,66.69 R101.1 76.52,66.18 ; 63.69,66.69 C114.2 v1(64.45,66.18) ; C54.2 v1(87.31,35.99) ; C54.2 86.8,35.23 ; C54.2 87.31,34.72 ; 29.91,60.72 C202.2 ; C79.2 v1(76.81,35.5) ; C79.2 77.57,34.99 ; C79.2 77.57,36.01 ; v1(75.88,25.79) 75.58,25.49 C88.2 75.07,24.51 ; 77.57,42.99 C82.2 v1(76.81,43.5) ; 69.41,57.07 C98.2 69.41,55.66 ; C152.2 47.92,60.68 ; C152.2 46.9,60.68 ; C152.2 v1(47.41,61.44) ; 29.91,20.08 C198.2 ; v1(76.81,33.5) C78.2 77.57,34.01 ; C76.2 78.59,31.01 ; C76.2 78.94,30.5 v1(79.57,31.13) ; C76.2 78.59,29.99 ; 53.42,31.51 C136.2 v1(52.91,32.27) ; 96.64,12.75 R80.2 ; R80.2 97.35,13.45 ; R80.2 97.35,12.04 ; v1(40.91,8.1) C169.2 41.42,7.34 ; 43.42,7.34 C164.2 v1(42.91,8.1) ; C53.2 88.84,33.22 ; C53.2 88.33,33.73 ; C53.2 v1(88.33,32.46) ; v1(72.08,46.23) C91.2 72.59,47 ; C106.2 67.59,38.01 ; C106.2 67.59,36.99 ; C106.2 v1(68.35,37.5) ; 70.57,47 C97.2 v1(71.08,46.23) ; 71.95,57.07 C92.2 71.95,55.66 ; 54.4,7.34 C116.2 ; C116.2 55.42,7.34 ; C116.2 v1(54.91,8.1) ; C161.2 44.42,17.33 ; C161.2 v1(43.91,16.56) ; C161.2 43.4,17.33 ; C187.2 v1(38.68,8.83) ; C187.2 37.92,9.34 ; C187.2 37.92,8.32 ; C143.2 v1(50.91,61.44) ; C143.2 50.4,60.68 ; C143.2 51.42,60.68 ; C81.2 v1(76.81,41.5) ; C81.2 77.57,42.01 ; C81.2 77.57,40.99 ; v1(52.64,35.5) C127.2 53.4,36.01 ; 63.62,71.61 C113.2 ; C113.2 64.33,72.31 ; C113.2 64.33,70.9 ; C63.2 C62.2 ; v1(53.41,16.56) C133.2 53.92,17.33 ; v1(49.41,16.56) C146.2 48.9,17.33 ; 29.65,12.97 C196.2 30.16,13.48 ; C181.2 v1(39.18,35) ; C181.2 38.42,34.49 ; C181.2 38.42,35.51 ; C195.2 37.42,70.67 ; C195.2 v1(36.91,69.9) ; C195.2 36.4,70.67 ; C87.2 76.59,31.01 ; C87.2 v1(76.08,31.77) ; C87.2 75.57,31.01 ; v1(68.39,25.79) 67.58,24.98 C102.2 67.07,24.51 ; 67.59,34.01 C104.2 v1(68.35,33.5) ; 92.39,49.67 R89.1 92.9,50.18 ; 77.03,58.43 R100.1 76.52,57.92 ; C50.2 C52.2 ; C50.2 C44.2 90.83,22.71 90.88,22.77 90.89,22.77 91.12,23 v1(91.25,23) ; C115.2 61.79,72.31 ; C115.2 62.49,71.61 ; C115.2 61.79,70.9 ; 51.4,46.5 C141.2 ; C141.2 52.42,46.5 ; C141.2 v1(51.91,45.73) ; 50.4,70.67 C144.2 v1(50.91,69.9) ; 37.92,12.82 C189.2 ; C189.2 v1(38.68,13.33) ; C189.2 37.92,13.84 ; 48.4,7.34 C148.2 ; C148.2 49.42,7.34 ; C148.2 v1(48.91,8.1) ; v1(67.59,48.27) C112.2 68.1,47.5 ; C61.2 C58.2 ; C61.2 86.32,20.24 86.33,20.25 C62.2 ; C61.2 C66.2 84.87,19.73 v1(84.77,19.82) 84.26,19.82 84.25,19.81 83.91,19.81 83.83,19.73 C69.2 ; C58.2 C59.2 ; v1(44.41,32.27) C159.2 44.92,32.02 ; C46.2 C45.2 89.31,18.46 v1(89.98,17.79) ; C46.2 C47.2 ; v1(53.14,64.17) C123.2 53.9,63.66 ; v1(38.91,45.73) C177.2 38.4,45.99 ; v1(76.81,45.5) C83.2 77.07,44.99 ; 53.4,38.51 C129.2 v1(52.64,38) ; 29.91,56.91 C201.2 ; J1.5 97.98,39.97 ; J1.5 97.98,38.04 ; J1.5 98.95,39 ; C176.2 39.42,17.33 ; C176.2 38.4,17.33 ; C176.2 v1(38.91,16.56) ; C59.2 C52.2 ; C67.2 85.28,48.82 ; C67.2 85.98,48.11 ; C67.2 85.28,47.41 ; C55.2 88.84,40.54 ; C55.2 88.33,41.05 ; C55.2 v1(88.33,39.78) ; 79.57,72.31 C75.2 78.86,71.61 ; 79.07,24.51 C72.2 ; C72.2 79.58,25.19 78.98,25.79 v1(78.42,25.79) ; C72.2 80.09,24.51 ; C137.2 53.42,60.68 ; C137.2 v1(52.91,61.44) ; C137.2 52.4,60.68 ; v1(68.35,32.5) C103.2 67.59,31.99 ; 37.91,45.99 C185.2 v1(37.15,46.5) ; C186.2 38.42,7.33 ; C186.2 37.92,6.82 ; C186.2 37.92,8.01 37.91,8.01 v1(37.91,8.07) ; v1(53.41,45.73) C134.2 52.9,46.5 ; 44.4,46.5 C158.2 v1(44.91,45.73) ; v1(52.64,37) C128.2 53.4,36.49 ; 44.9,7.34 C155.2 ; C155.2 v1(45.41,8.1) ; C155.2 45.92,7.34 ; C149.2 49.42,70.67 ; C149.2 48.4,70.67 ; C149.2 v1(48.91,69.9) ; v1(84.77,4.2) C68.2 84.52,4.46 ; 94.04,37.6 R86.2 93.03,37.6 ; 89.02,73.71 C49.2 89.73,74.41 ; C90.2 73.59,31.01 ; C90.2 72.57,31.01 ; C90.2 v1(73.08,31.77) ; v1(38.68,62.67) C191.2 38.42,62.93 ; 45.92,31.51 C156.2 v1(45.41,32.27) ; 84.14,73.16 R92.1 84.65,73.67 ; J1.3 97.98,37.43 ; J1.3 97.98,35.5 ; J1.3 98.95,36.46 ; C85.2 79.1,47.5 ; C85.2 78.59,48.01 ; C85.2 78.72,47.64 v1(79.57,47.64) ; 51.4,70.16 C142.2 v1(51.91,69.9) ; v1(42.41,69.9) C166.2 41.9,70.67 ; 30.16,17.29 C197.2 29.65,16.78 ; C62.2 C47.2 ; v1(40.91,45.73) C170.2 41.42,46.5 ; 42.92,60.68 C165.2 v1(42.41,61.44) ; 29.91,64.53 C203.2 ; C179.2 v1(38.41,32.27) ; C179.2 38.92,31.51 ; C179.2 37.9,31.51 ; v1(68.35,42.5) C108.2 67.59,41.99 ; v1(53.9,60.91) C122.2 53.4,61.67 ; v1(38.68,65.67) C193.2 37.92,66.18 ; 29.91,23.89 C199.2 ; 40.9,60.68 C168.2 v1(41.41,61.44) ; 23.18,31.89 C204.2 ; C204.2 23.69,32.4 ; C204.2 v1(24.45,31.89)
  BOTTOM w0.508: C98.2 v1(68.6,56.37) ; C73.2 v1(79.57,57.51) ; C92.2 v1(72.75,56.37) ; C201.2 30.16,56.91 30.92,56.15 v1(31.94,56.15) ; v1(31.94,19.32) 30.92,19.32 30.16,20.08 C198.2 ; v1(31.94,11.7) 30.92,11.7 30.16,12.46 C196.2 ; C197.2 30.16,16.27 30.54,15.89 v1(31.94,15.89) ; C89.2 v1(74.49,72.75) ; v1(31.94,59.96) 30.92,59.96 30.16,60.72 C202.2 ; R80.2 97.73,12.75 98.23,12.24 v1(98.23,11.7) ; C199.2 30.16,23.89 30.92,23.13 v1(31.94,23.13) ; C49.2 v1(89.73,72.75) ; C99.2 v1(68.6,64.62) ; v1(31.94,52.34) 30.92,52.34 30.16,53.1 C200.2 ; C203.2 30.16,64.53 30.92,63.77 v1(31.92,63.77) ; C115.2 v1(60.98,71.61) ; C113.2 v1(65.13,71.61) ; R81.2 v1(96.39,65.26) ; C86.2 v1(76.22,71.61) ; C75.2 v1(80.37,71.61) ; C93.2 v1(72.75,64.62) ; C60.2 v1(87.19,72.75) ; C43.2 v1(95.44,49.25) ; C94.2 v1(71.95,72.75) ; C42.2 v1(97.98,49.25) ; C71.2 v1(82.11,65.76) ; C57.2 v1(88.63,48.11) ; C67.2 v1(84.48,48.11) ; C70.2 v1(82.11,57.51) ; C74.2 v1(79.57,65.76)
  BOTTOM w0.61: v1(65.13,70.91) 65.13,70.91 v1(65.13,71.61) ; v1(80.37,70.91) 80.37,70.91 v1(80.37,71.61) ; v1(72.75,64.62) v1(72.75,63.92) ; v1(88.63,48.11) v1(88.63,47.41) ; v1(72.75,56.37) 72.75,55.67 v1(72.75,55.67) ; v1(68.6,64.62) v1(68.6,63.92) ; v1(76.22,70.91) 76.22,70.91 v1(76.22,71.61) ; v1(60.98,70.91) 60.98,70.91 v1(60.98,71.61) ; v1(68.6,55.67) v1(68.6,56.37) ; v1(84.48,47.41) v1(84.48,48.11)
  vias: v1(80.12,4.79) v1(86.98,22.06) v1(86.98,21.22) v1(86.98,20.38) v1(87.82,22.06) v1(87.82,20.38) v1(88.66,22.06) v1(88.66,21.22) v1(88.66,20.38) v1(93.08,77) v2(40.83,66.94) v2(40.83,64.4) v2(40.83,13.6) v2(40.83,11.06) v2(43.37,66.94) v2(43.37,64.4) v2(43.37,13.6) v2(43.37,11.06) v2(45.91,66.94) v2(45.91,64.4) v2(45.91,13.6) v2(45.91,11.06) v2(48.45,66.94) v2(48.45,64.4) v2(48.45,13.6) v2(48.45,11.06) v2(50.99,66.94) v2(50.99,64.4) v2(50.99,13.6) v2(50.99,11.06) v2(71.31,44.08) v2(71.31,41.54) v2(71.31,39) v2(71.31,36.46) v2(71.31,33.92) v2(73.85,44.08) v2(73.85,41.54) v2(73.85,39) v2(73.85,36.46) v2(73.85,33.92)
